# Altium PCB PCB.PcbDoc
Units mm, origin at the board's own origin, x right, y up, seen from the top; angles counter-clockwise.
Board outline 90 x 90 mm, 2 copper layers (Top Layer, Bottom Layer); 157 components, 81 nets, 472 pads, 104 vias.
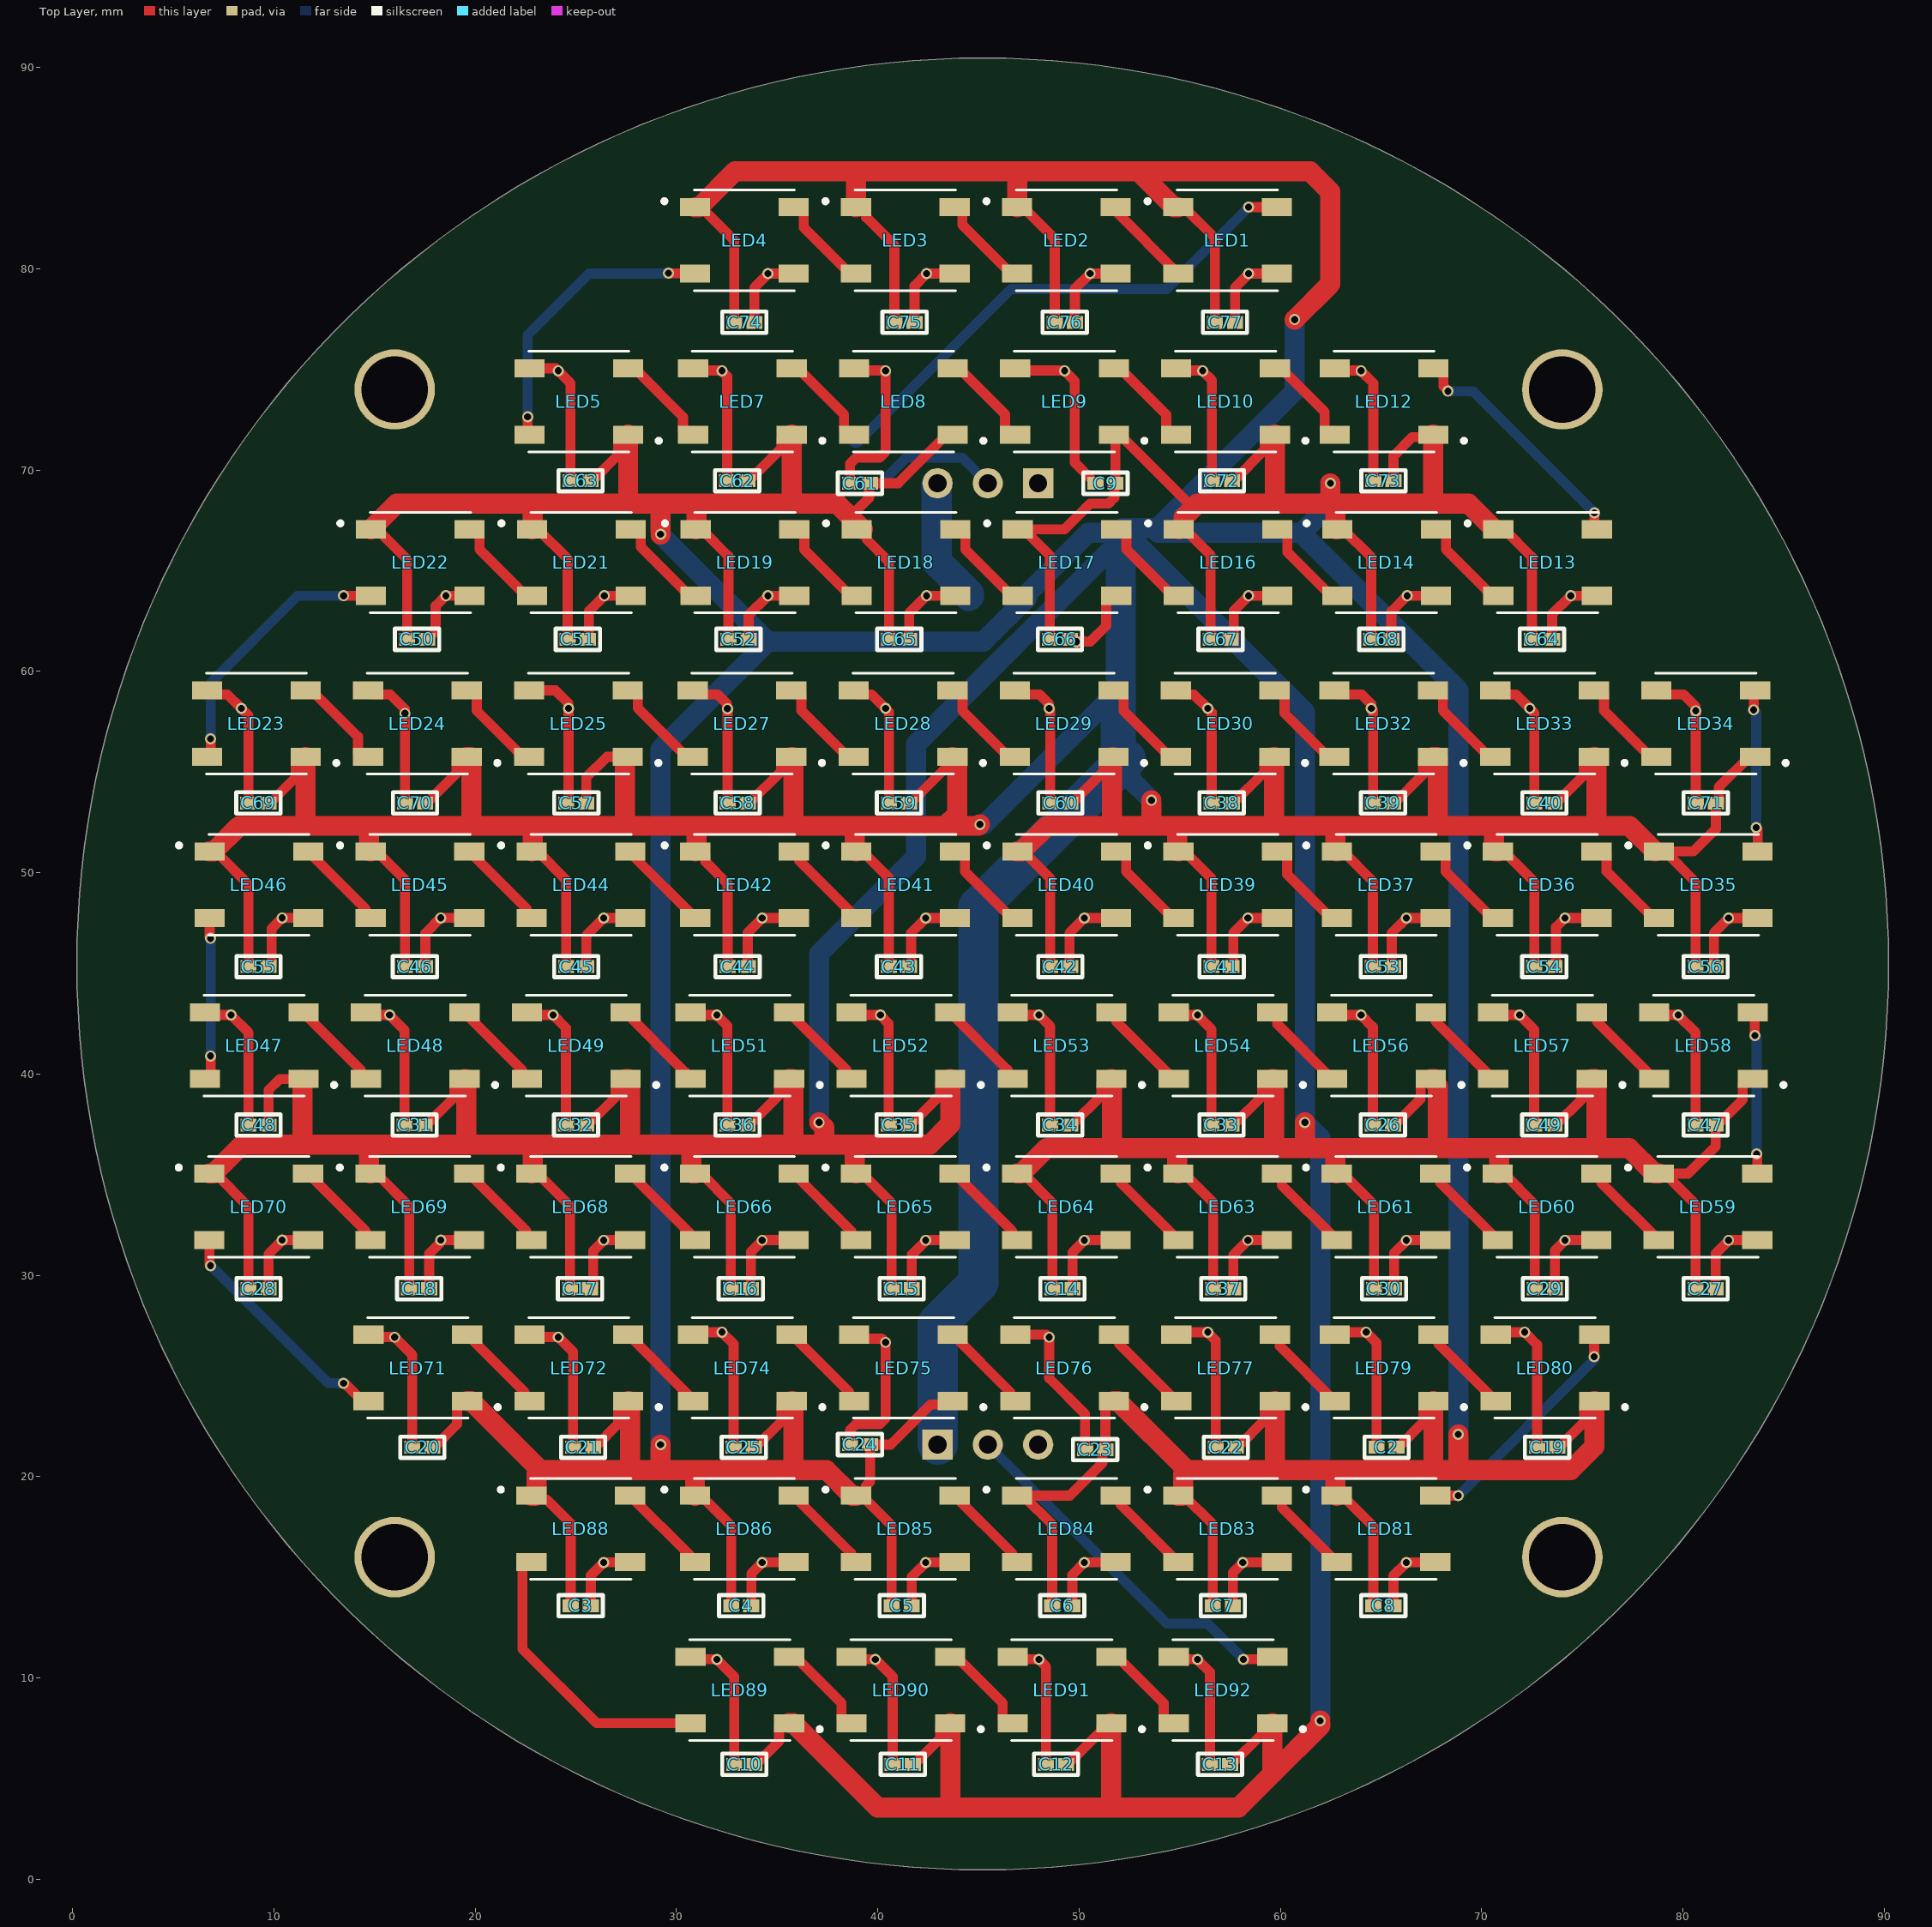
[diagram p0: Top Layer view]
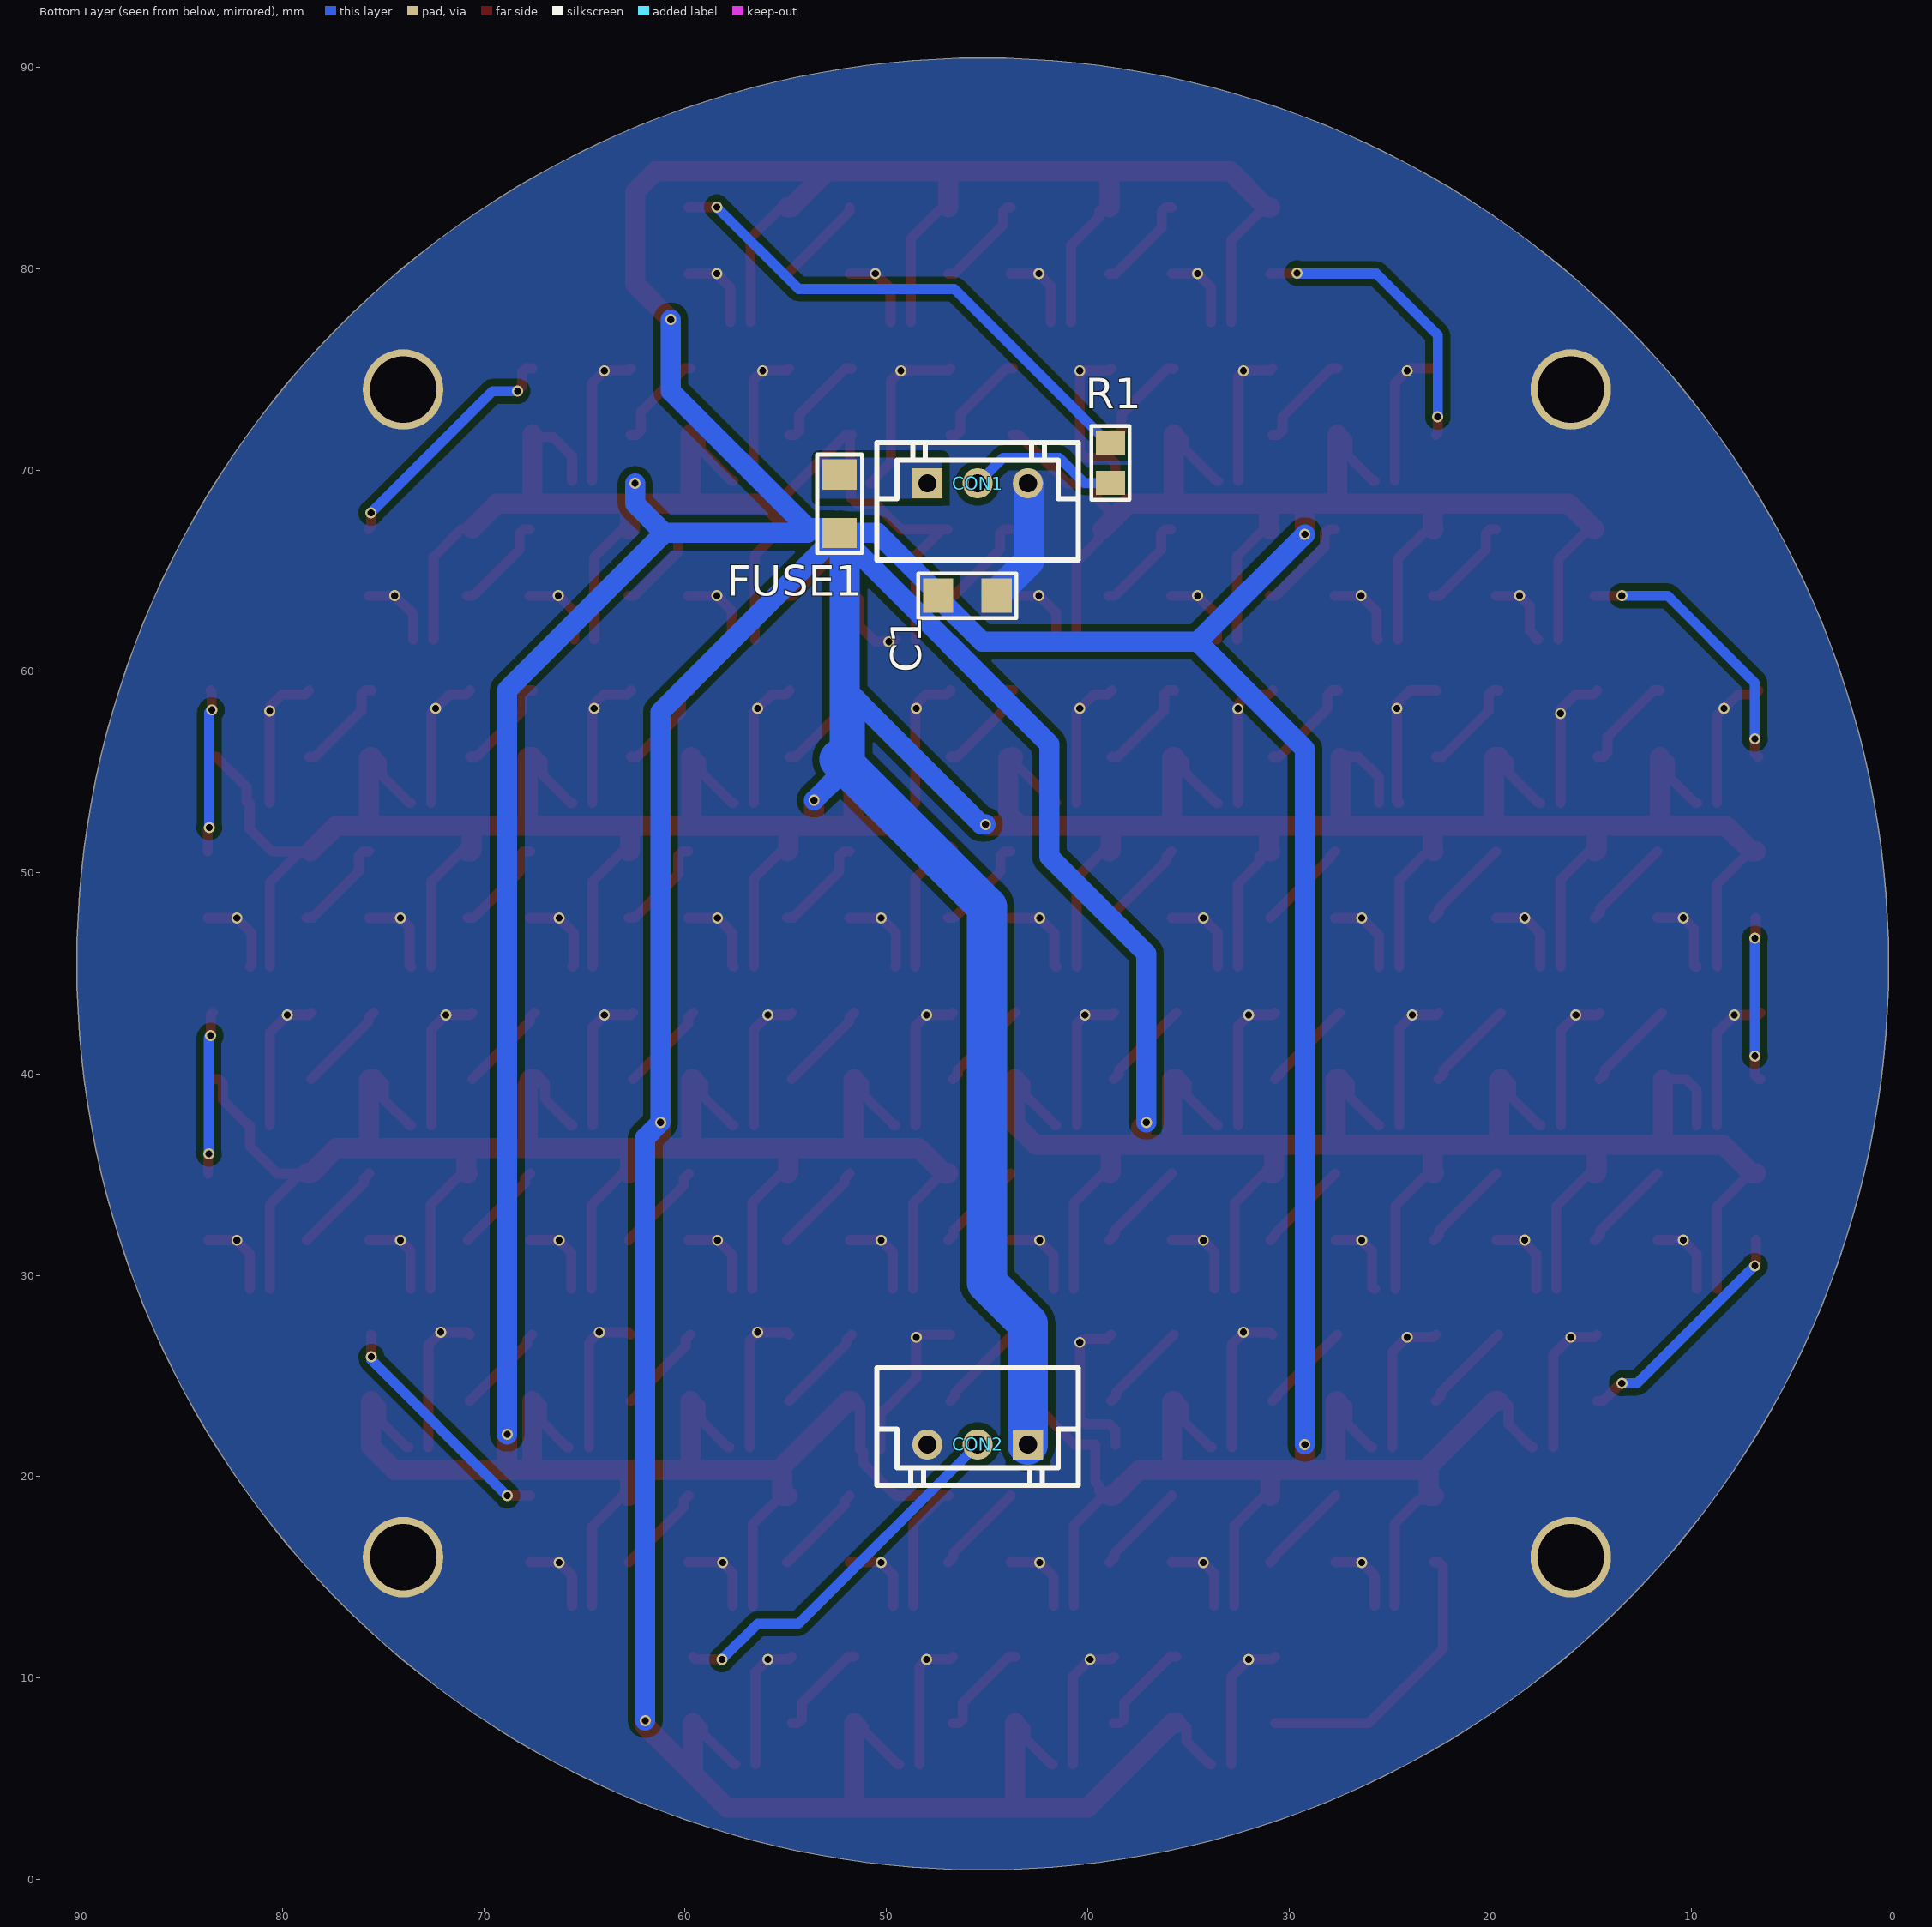
[diagram p1: Bottom Layer view, seen from below]
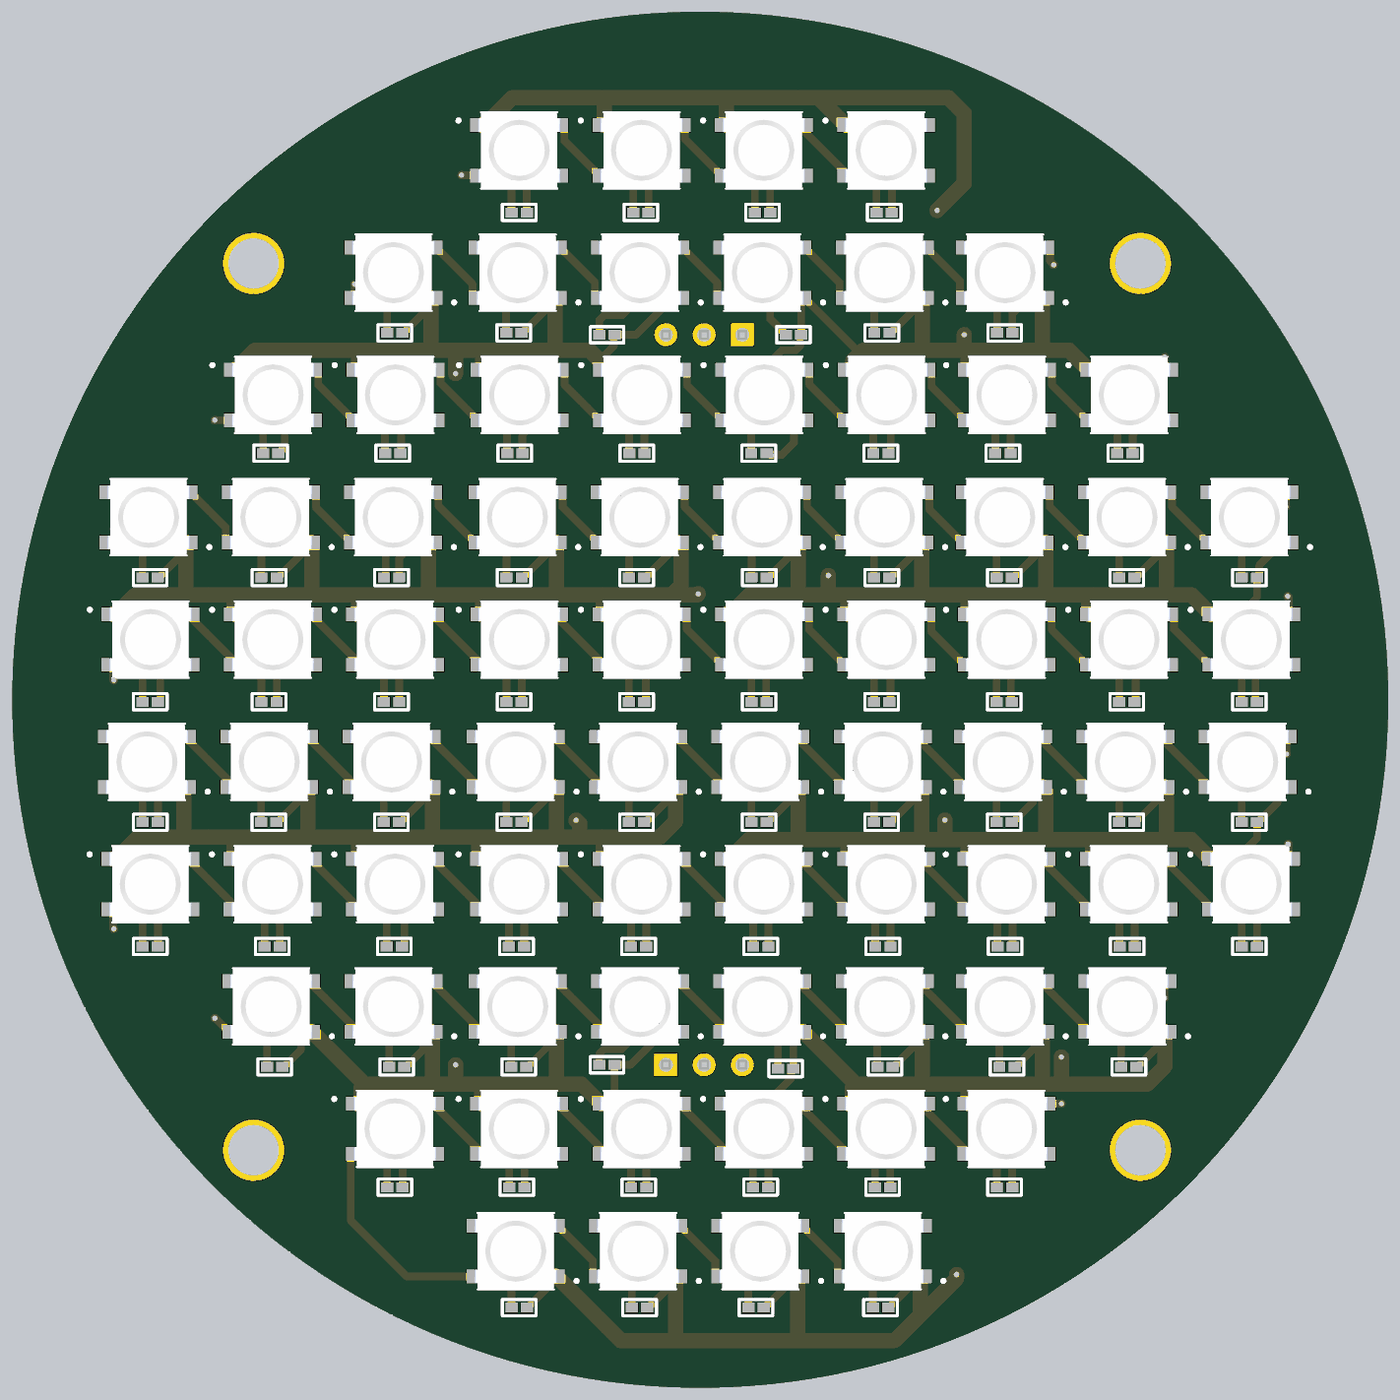
[diagram p2: 3D render of the assembled board from above, using the file's embedded part models]

## Layer stack, top to bottom
Top Solder: solder mask 0.0102, Solder Resist, Dk 3.5
Top Layer: signal copper 0.0356
Dielectric 1: dielectric 0.32, FR-4, Dk 4.8
Bottom Layer: signal copper 0.0356
Bottom Solder: solder mask 0.0102, Solder Resist, Dk 3.5

## Board outline
45.212,0.466 cw(c45.212,45.466) 0.212,45.466 cw(c45.212,45.466) 45.212,90.466 cw(c45.212,45.466) 90.212,45.466 cw(c45.212,45.466)

## Design rules (kind name [scope] priority, off if disabled: settings)
Clearance TOP5VPolygonRule [InNet('+5') And OnLayer('Top Layer')] p1: gap=0.15 ignorepadtopadclearanceinfootprint=FALSE except(0.127: Arc-Arc Arc-Track Arc-Text Track-Track Track-Text SMDPad-Text THPad-Text Via-Text Fill-Text Poly-Text Region-Text Text-Text; 0.2: Arc-Hole Track-Hole SMDPad-Hole THPad-Hole Via-Hole Fill-Hole Poly-Hole Region-Hole Text-Hole; 0.8: Arc-Poly Track-Poly SMDPad-Poly THPad-Poly Via-Poly Fill-Poly Poly-Poly)
Clearance [All] p2: gap=0.15 ignorepadtopadclearanceinfootprint=FALSE except(0.127: Arc-Arc Arc-Track Arc-Text Track-Track Track-Text SMDPad-Text THPad-Text Via-Text Fill-Text Poly-Text Region-Text Text-Text; 0.2: Arc-Hole Track-Hole SMDPad-Hole THPad-Hole Via-Hole Fill-Hole Poly-Hole Region-Hole Text-Hole; 0.3: SMDPad-Poly; 0.35: Arc-Poly Track-Poly THPad-Poly Via-Poly Fill-Poly Poly-Poly)
DiffPairsRouting ETH_Diff_Pairs [InDifferentialPairClass('ETH_100')] p1: maxlimit=0.127 minlimit=0.127 mostfreqgap=0.127 toplayer_minwidth=0.199 toplayer_maxwidth=0.201 toplayer_prefwidth=0.2 bottomlayer_minwidth=0.381 bottomlayer_maxwidth=0.381 bottomlayer_prefwidth=0.381 impedanceprofiledriven=TRUE impedanceprofileid={67EA3319-1B06-4267-A583-B87243AFF59C} maxuncoupledlength=12.7
DiffPairsRouting USB_Diff_Pairs [InDifferentialPairClass('USB_90')] p2: maxlimit=0.127 minlimit=0.127 mostfreqgap=0.127 toplayer_minwidth=0.263 toplayer_maxwidth=0.265 toplayer_prefwidth=0.264 bottomlayer_minwidth=0.381 bottomlayer_maxwidth=0.381 bottomlayer_prefwidth=0.381 impedanceprofiledriven=TRUE impedanceprofileid={53291188-D804-453C-AF2B-D6B1297CFEFC} maxuncoupledlength=12.7
DiffPairsRouting [All] p3: maxlimit=0.254 minlimit=0.254 mostfreqgap=0.254 toplayer_minwidth=0.127 toplayer_maxwidth=0.381 toplayer_prefwidth=0.381 bottomlayer_minwidth=0.127 bottomlayer_maxwidth=0.381 bottomlayer_prefwidth=0.381 maxuncoupledlength=12.7
HoleSize [All] p1: absolutevalues=TRUE maxlimit=6.3 minlimit=0.15 maxpercent=80.000 minpercent=20.000
HoleToHoleClearance [All] p1: gap=0.2 allowstackedmicrovias=TRUE
MatchedLengths IntraPairDiffAll [InDifferentialPairClass('All Differential Pairs')] p1: tolerance=0.1 checknetsindiffpair=TRUE checkdiffpairvsdiffpair=FALSE checkxsignals=FALSE checkothers=FALSE phasematching=TRUE phasetolerance=0.127 phasedistance=4
MatchedLengths InterPairDiffETH [InDifferentialPairClass('ETH_100')] p2: tolerance=5 checknetsindiffpair=FALSE checkdiffpairvsdiffpair=TRUE checkxsignals=TRUE checkothers=TRUE
MinimumSolderMaskSliver [All] p1: minsoldermaskwidth=0
PlaneConnect [All] p1: planeconnectstyle=Direct reliefexpansion=0.508 reliefentries=4 reliefconductorwidth=0.254 reliefairgap=0.254
PolygonConnect [All] p1: connectstyle=Direct reliefconductorwidth=0.254 reliefentries=4 polygonreliefangle="90 Angle" airgapwidth=0.254
RoutingVias [All] p1: holewidth=0.35 width=0.55 viastyle="Through Hole" minholewidth=0.15 minwidth=0.25 maxholewidth=1 maxwidth=1.5
SilkToSilkClearance [All] p1: silktosilkclearance=0.127
SilkToSolderMaskClearance [IsPad] p1: minsilkscreentomaskgap=0 clearancetoexposedcopper=TRUE
SolderMaskExpansion ViaExpansion [IsVia] p1: expansion=0 istentingtop=TRUE
SolderMaskExpansion [All] p2: expansion=0.051 istentingtop=FALSE
SupplyNets "Schematic Supply Nets" [InNet('+5')] p1: voltage=0.000
SupplyNets "Schematic Supply Nets_2" [InNet('GND')] p2: voltage=0.000
UnRoutedNet [All] p1: checkbadconnections=TRUE
Width I2S_Width [InNetClass('I2S_50')] p1: maxlimit=5.08 minlimit=0.127 preferedwidth=0.381 toplayer_minwidth=0.38 toplayer_maxwidth=0.382 bottomlayer_prefwidth=0.38 impedanceprofiledriven=TRUE impedanceprofileid={8BD9EF65-455B-45C8-BD0B-9EDE171B15C2} minimp=50.000000 maximp=50.000000 favimp=50.000000
Width [All] p2: maxlimit=5.08 minlimit=0.127 preferedwidth=0.3
22 further rules are at their usual default settings.

## Classes and differential pairs
component class LEDs: C1 CON1 CON2 FUSE1 LED1 LED2 LED3 LED4 LED5 LED7 LED8 LED9 LED10 LED12 LED13 LED14 LED16 LED17 LED18 LED19 LED21 LED22 LED23 LED24 LED25 LED27 LED28 LED29 LED30 LED32 LED33 LED34 LED35 LED36 LED37 LED39 LED40 LED41 LED42 LED44 LED45 LED46 LED47 LED48 LED49 LED51 LED52 LED53 LED54 LED56 LED57 LED58 LED59 LED60 LED61 LED63 LED64 LED65 LED66 LED68 LED69 LED70 LED71 LED72 LED74 LED75 LED76 LED77 LED79 LED80 LED81 LED83 LED84 LED85 LED86 LED88 LED89 LED90 LED91 LED92 R1
component class Capacitors: C2 C3 C4 C5 C6 C7 C8 C9 C10 C11 C12 C13 C14 C15 C16 C17 C18 C19 C20 C21 C22 C23 C24 C25 C26 C27 C28 C29 C30 C31 C32 C33 C34 C35 C36 C37 C38 C39 C40 C41 C42 C43 C44 C45 C46 C47 C48 C49 C50 C51 C52 C53 C54 C55 C56 C57 C58 C59 C60 C61 C62 C63 C64 C65 C66 C67 C68 C69 C70 C71 C72 C73 C74 C75 C76 C77

## Components (designator, comment, footprint, x,y, rotation, side; value= is the part's Value field where it differs from the comment)
C1 "47uF 10V" CAP_1206 45.974,63.754 r0 bottom
C2 "100nF" CAP_0402 65.273,21.458 r180 top
C3 "100nF" CAP_0402 25.242,13.584 r0 top
C4 "100nF" CAP_0402 33.216,13.584 r0 top
C5 "100nF" CAP_0402 41.19,13.584 r0 top
C6 "100nF" CAP_0402 49.164,13.584 r0 top
C7 "100nF" CAP_0402 57.138,13.584 r0 top
C8 "100nF" CAP_0402 65.112,13.584 r0 top
C9 "100nF" CAP_0402 51.308,69.342 r180 top
C10 "100nF" CAP_0402 33.37,5.71 r180 top
C11 "100nF" CAP_0402 41.244,5.71 r180 top
C12 "100nF" CAP_0402 48.856,5.71 r180 top
C13 "100nF" CAP_0402 57,5.71 r180 top
C14 "100nF" CAP_0402 49.171,29.332 r0 top
C15 "100nF" CAP_0402 41.183,29.332 r0 top
C16 "100nF" CAP_0402 33.195,29.332 r0 top
C17 "100nF" CAP_0402 25.208,29.332 r0 top
C18 "100nF" CAP_0402 17.22,29.332 r0 top
C19 "100nF" CAP_0402 73.248,21.458 r180 top
C20 "100nF" CAP_0402 17.376,21.458 r180 top
C21 "100nF" CAP_0402 25.359,21.458 r180 top
C22 "100nF" CAP_0402 57.29,21.458 r180 top
C23 "100nF" CAP_0402 50.8,21.336 r180 top
C24 "100nF" CAP_0402 39.116,21.59 r180 top
C25 "100nF" CAP_0402 33.342,21.458 r180 top
C26 "100nF" CAP_0402 65.09,37.46 r180 top
C27 "100nF" CAP_0402 81.122,29.332 r0 top
C28 "100nF" CAP_0402 9.24,29.332 r0 top
C29 "100nF" CAP_0402 73.134,29.332 r0 top
C30 "100nF" CAP_0402 65.146,29.332 r0 top
C31 "100nF" CAP_0402 16.994,37.46 r180 top
C32 "100nF" CAP_0402 25.01,37.46 r180 top
C33 "100nF" CAP_0402 57.074,37.46 r180 top
C34 "100nF" CAP_0402 49.058,37.46 r180 top
C35 "100nF" CAP_0402 41.042,37.46 r180 top
C36 "100nF" CAP_0402 33.026,37.46 r180 top
C37 "100nF" CAP_0402 57.159,29.332 r0 top
C38 "100nF" CAP_0402 57.085,53.462 r180 top
C39 "100nF" CAP_0402 65.1,53.462 r180 top
C40 "100nF" CAP_0402 73.115,53.462 r180 top
C41 "100nF" CAP_0402 57.079,45.334 r0 top
C42 "100nF" CAP_0402 49.065,45.334 r0 top
C43 "100nF" CAP_0402 41.051,45.334 r0 top
C44 "100nF" CAP_0402 33.037,45.334 r0 top
C45 "100nF" CAP_0402 25.022,45.334 r0 top
C46 "100nF" CAP_0402 17.008,45.334 r0 top
C47 "100nF" CAP_0402 81.122,37.46 r180 top
C48 "100nF" CAP_0402 9.24,37.46 r180 top
C49 "100nF" CAP_0402 73.106,37.46 r180 top
C50 "100nF" CAP_0402 17.114,61.59 r0 top
C51 "100nF" CAP_0402 25.097,61.59 r0 top
C52 "100nF" CAP_0402 33.08,61.59 r0 top
C53 "100nF" CAP_0402 65.094,45.334 r0 top
C54 "100nF" CAP_0402 73.108,45.334 r0 top
C55 "100nF" CAP_0402 9.24,45.334 r0 top
C56 "100nF" CAP_0402 81.122,45.334 r0 top
C57 "100nF" CAP_0402 25.024,53.462 r180 top
C58 "100nF" CAP_0402 33.039,53.462 r180 top
C59 "100nF" CAP_0402 41.054,53.462 r180 top
C60 "100nF" CAP_0402 49.07,53.462 r180 top
C61 "100nF" CAP_0402 39.116,69.342 r180 top
C62 "100nF" CAP_0402 33.014,69.464 r180 top
C63 "100nF" CAP_0402 25.234,69.464 r180 top
C64 "100nF" CAP_0402 72.994,61.59 r0 top
C65 "100nF" CAP_0402 41.063,61.59 r0 top
C66 "100nF" CAP_0402 49.045,61.59 r0 top
C67 "100nF" CAP_0402 57.028,61.59 r0 top
C68 "100nF" CAP_0402 65.011,61.59 r0 top
C69 "100nF" CAP_0402 9.232,53.462 r180 top
C70 "100nF" CAP_0402 17.009,53.462 r180 top
C71 "100nF" CAP_0402 81.13,53.462 r180 top
C72 "100nF" CAP_0402 57.094,69.464 r180 top
C73 "100nF" CAP_0402 65.12,69.464 r180 top
C74 "100nF" CAP_0402 33.37,77.338 r0 top
C75 "100nF" CAP_0402 41.329,77.338 r0 top
C76 "100nF" CAP_0402 49.287,77.338 r0 top
C77 "100nF" CAP_0402 57.246,77.338 r0 top
CON1 "HX-XH2.54-3PZZ" "JST XH2.54mm 1x3" 45.466,69.342 r0 bottom
CON2 "HX-XH2.54-3PZZ" "JST XH2.54mm 1x3" 45.466,21.59 r180 bottom
FUSE1 "2A" FUSE_1206 52.324,68.326 r90 bottom
LED1 "Worldsemi WS2812B-B/W" "SMD5050 - WS2812B-B" 57.37,81.402 r0 top
LED2 "Worldsemi WS2812B-B/W" "SMD5050 - WS2812B-B" 49.37,81.402 r0 top
LED3 "Worldsemi WS2812B-B/W" "SMD5050 - WS2812B-B" 41.37,81.402 r0 top
LED4 "Worldsemi WS2812B-B/W" "SMD5050 - WS2812B-B" 33.37,81.402 r0 top
LED5 "Worldsemi WS2812B-B/W" "SMD5050 - WS2812B-B" 25.148,73.402 r180 top
LED7 "Worldsemi WS2812B-B/W" "SMD5050 - WS2812B-B" 33.274,73.402 r180 top
LED8 "Worldsemi WS2812B-B/W" "SMD5050 - WS2812B-B" 41.274,73.402 r180 top
LED9 "Worldsemi WS2812B-B/W" "SMD5050 - WS2812B-B" 49.274,73.402 r180 top
LED10 "Worldsemi WS2812B-B/W" "SMD5050 - WS2812B-B" 57.274,73.402 r180 top
LED12 "Worldsemi WS2812B-B/W" "SMD5050 - WS2812B-B" 65.146,73.402 r180 top
LED13 "Worldsemi WS2812B-B/W" "SMD5050 - WS2812B-B" 73.271,65.402 r0 top
LED14 "Worldsemi WS2812B-B/W" "SMD5050 - WS2812B-B" 65.271,65.402 r0 top
LED16 "Worldsemi WS2812B-B/W" "SMD5050 - WS2812B-B" 57.399,65.402 r0 top
LED17 "Worldsemi WS2812B-B/W" "SMD5050 - WS2812B-B" 49.399,65.402 r0 top
LED18 "Worldsemi WS2812B-B/W" "SMD5050 - WS2812B-B" 41.399,65.402 r0 top
LED19 "Worldsemi WS2812B-B/W" "SMD5050 - WS2812B-B" 33.399,65.402 r0 top
LED21 "Worldsemi WS2812B-B/W" "SMD5050 - WS2812B-B" 25.273,65.402 r0 top
LED22 "Worldsemi WS2812B-B/W" "SMD5050 - WS2812B-B" 17.273,65.402 r0 top
LED23 "Worldsemi WS2812B-B/W" "SMD5050 - WS2812B-B" 9.13,57.402 r180 top
LED24 "Worldsemi WS2812B-B/W" "SMD5050 - WS2812B-B" 17.13,57.402 r180 top
LED25 "Worldsemi WS2812B-B/W" "SMD5050 - WS2812B-B" 25.13,57.402 r180 top
LED27 "Worldsemi WS2812B-B/W" "SMD5050 - WS2812B-B" 33.256,57.402 r180 top
LED28 "Worldsemi WS2812B-B/W" "SMD5050 - WS2812B-B" 41.256,57.402 r180 top
LED29 "Worldsemi WS2812B-B/W" "SMD5050 - WS2812B-B" 49.256,57.402 r180 top
LED30 "Worldsemi WS2812B-B/W" "SMD5050 - WS2812B-B" 57.256,57.402 r180 top
LED32 "Worldsemi WS2812B-B/W" "SMD5050 - WS2812B-B" 65.128,57.402 r180 top
LED33 "Worldsemi WS2812B-B/W" "SMD5050 - WS2812B-B" 73.128,57.402 r180 top
LED34 "Worldsemi WS2812B-B/W" "SMD5050 - WS2812B-B" 81.128,57.402 r180 top
LED35 "Worldsemi WS2812B-B/W" "SMD5050 - WS2812B-B" 81.255,49.402 r0 top
LED36 "Worldsemi WS2812B-B/W" "SMD5050 - WS2812B-B" 73.255,49.402 r0 top
LED37 "Worldsemi WS2812B-B/W" "SMD5050 - WS2812B-B" 65.255,49.402 r0 top
LED39 "Worldsemi WS2812B-B/W" "SMD5050 - WS2812B-B" 57.383,49.402 r0 top
LED40 "Worldsemi WS2812B-B/W" "SMD5050 - WS2812B-B" 49.383,49.402 r0 top
LED41 "Worldsemi WS2812B-B/W" "SMD5050 - WS2812B-B" 41.383,49.402 r0 top
LED42 "Worldsemi WS2812B-B/W" "SMD5050 - WS2812B-B" 33.383,49.402 r0 top
LED44 "Worldsemi WS2812B-B/W" "SMD5050 - WS2812B-B" 25.257,49.402 r0 top
LED45 "Worldsemi WS2812B-B/W" "SMD5050 - WS2812B-B" 17.257,49.402 r0 top
LED46 "Worldsemi WS2812B-B/W" "SMD5050 - WS2812B-B" 9.257,49.402 r0 top
LED47 "Worldsemi WS2812B-B/W" "SMD5050 - WS2812B-B" 9.022,41.402 r180 top
LED48 "Worldsemi WS2812B-B/W" "SMD5050 - WS2812B-B" 17.022,41.402 r180 top
LED49 "Worldsemi WS2812B-B/W" "SMD5050 - WS2812B-B" 25.022,41.402 r180 top
LED51 "Worldsemi WS2812B-B/W" "SMD5050 - WS2812B-B" 33.148,41.402 r180 top
LED52 "Worldsemi WS2812B-B/W" "SMD5050 - WS2812B-B" 41.148,41.402 r180 top
LED53 "Worldsemi WS2812B-B/W" "SMD5050 - WS2812B-B" 49.148,41.402 r180 top
LED54 "Worldsemi WS2812B-B/W" "SMD5050 - WS2812B-B" 57.148,41.402 r180 top
LED56 "Worldsemi WS2812B-B/W" "SMD5050 - WS2812B-B" 65.02,41.402 r180 top
LED57 "Worldsemi WS2812B-B/W" "SMD5050 - WS2812B-B" 73.02,41.402 r180 top
LED58 "Worldsemi WS2812B-B/W" "SMD5050 - WS2812B-B" 81.02,41.402 r180 top
LED59 "Worldsemi WS2812B-B/W" "SMD5050 - WS2812B-B" 81.242,33.402 r0 top
LED60 "Worldsemi WS2812B-B/W" "SMD5050 - WS2812B-B" 73.242,33.402 r0 top
LED61 "Worldsemi WS2812B-B/W" "SMD5050 - WS2812B-B" 65.242,33.402 r0 top
LED63 "Worldsemi WS2812B-B/W" "SMD5050 - WS2812B-B" 57.37,33.402 r0 top
LED64 "Worldsemi WS2812B-B/W" "SMD5050 - WS2812B-B" 49.37,33.402 r0 top
LED65 "Worldsemi WS2812B-B/W" "SMD5050 - WS2812B-B" 41.37,33.402 r0 top
LED66 "Worldsemi WS2812B-B/W" "SMD5050 - WS2812B-B" 33.37,33.402 r0 top
LED68 "Worldsemi WS2812B-B/W" "SMD5050 - WS2812B-B" 25.244,33.402 r0 top
LED69 "Worldsemi WS2812B-B/W" "SMD5050 - WS2812B-B" 17.244,33.402 r0 top
LED70 "Worldsemi WS2812B-B/W" "SMD5050 - WS2812B-B" 9.244,33.402 r0 top
LED71 "Worldsemi WS2812B-B/W" "SMD5050 - WS2812B-B" 17.149,25.402 r180 top
LED72 "Worldsemi WS2812B-B/W" "SMD5050 - WS2812B-B" 25.149,25.402 r180 top
LED74 "Worldsemi WS2812B-B/W" "SMD5050 - WS2812B-B" 33.275,25.402 r180 top
LED75 "Worldsemi WS2812B-B/W" "SMD5050 - WS2812B-B" 41.275,25.402 r180 top
LED76 "Worldsemi WS2812B-B/W" "SMD5050 - WS2812B-B" 49.275,25.402 r180 top
LED77 "Worldsemi WS2812B-B/W" "SMD5050 - WS2812B-B" 57.275,25.402 r180 top
LED79 "Worldsemi WS2812B-B/W" "SMD5050 - WS2812B-B" 65.147,25.402 r180 top
LED80 "Worldsemi WS2812B-B/W" "SMD5050 - WS2812B-B" 73.147,25.402 r180 top
LED81 "Worldsemi WS2812B-B/W" "SMD5050 - WS2812B-B" 65.242,17.402 r0 top
LED83 "Worldsemi WS2812B-B/W" "SMD5050 - WS2812B-B" 57.37,17.402 r0 top
LED84 "Worldsemi WS2812B-B/W" "SMD5050 - WS2812B-B" 49.37,17.402 r0 top
LED85 "Worldsemi WS2812B-B/W" "SMD5050 - WS2812B-B" 41.37,17.402 r0 top
LED86 "Worldsemi WS2812B-B/W" "SMD5050 - WS2812B-B" 33.37,17.402 r0 top
LED88 "Worldsemi WS2812B-B/W" "SMD5050 - WS2812B-B" 25.244,17.402 r0 top
LED89 "Worldsemi WS2812B-B/W" "SMD5050 - WS2812B-B" 33.148,9.402 r180 top
LED90 "Worldsemi WS2812B-B/W" "SMD5050 - WS2812B-B" 41.148,9.402 r180 top
LED91 "Worldsemi WS2812B-B/W" "SMD5050 - WS2812B-B" 49.148,9.402 r180 top
LED92 "Worldsemi WS2812B-B/W" "SMD5050 - WS2812B-B" 57.148,9.402 r180 top
R1 "500" RES_0805 38.862,70.358 r270 bottom

## Footprints (in the part's own frame and the unit in brackets; to place one, negate y for a bottom-side part, rotate by r counter-clockwise, add the part's x,y. Pads: shape width x height; smd on the part's side, far side on the other; paste and mask are expansions set on the pad)
CAP_0402 [mm] "Chip Capacitor, 2-Leads, Body 1,06x0,51mm, IPC Medium Density"
  rect 0.8x0.64 smd: 1(-0.5,0) 2(0.5,0)
  silkscreen extent -1.1,-0.53 1.1,0.53, body extent -0.55,-0.26 0.55,0.25, height 0.5
CAP_1206 [mm] "Chip Capacitor, 2-Leads, Body 3,05x1,56mm, IPC Medium Density"
  rect 1.5x1.7 smd: 1(-1.45,0) 2(1.45,0)
  silkscreen extent -2.44,-1.11 2.44,1.11, body extent -1.53,-0.8 1.53,0.8, height 0.8
FUSE_1206 [mm]
  rect 1.5x1.7 smd: 1(-1.45,0) 2(1.45,0)
  silkscreen extent -2.44,-1.11 2.44,1.11, body extent -1.53,-0.8 1.53,0.8, height 0.8
"JST XH2.54mm 1x3" [mm]
  rect 1.5x1.5 hole 0.9 paste-2539.97 mask+0.051: 1(2.5,0)
  round 1.5 hole 0.9 paste-2539.97 mask+0.051: 2(0,0) 3(-2.5,0)
  silkscreen extent -5,-2.03 5,3.81, body extent -4.95,-1.99 4.95,3.76, height 7.1
RES_0805 [mm]
  rect 1.2x1.45 smd: 1(-1,0) 2(1,0)
  silkscreen extent -1.83,-0.95 1.83,0.95, body extent -1.02,-0.7 1.02,0.7, height 1.3
"SMD5050 - WS2812B-B" [mm]
  rect 1.5x0.9 smd: 1(-2.45,1.65) 2(-2.45,-1.65) 3(2.45,-1.65) 4(2.45,1.65)
  silkscreen extent -4.07,-2.5 2.5,2.5, body extent -2.7,-2.5 2.7,2.5, height 1.62

## Part data
C1: library part CAP_1206, "CAP_1206", note="any manufacturer", sample link=https://www.lcsc.com/product-detail/C178332.html?spm=wm.fly.bg.5.xh___wm.fly.tp.3.ml&lcsc_vid=FFFZU1cHTlNeU1AHFQIIVgUAFgNWV1cEFVMNBl0AEgcxVlNeR1RZVVJUQVJaUTsOAxUeFF5JWBYZEEoKFBINSQcJGk4NBhADEA4cHktXRlVeSQwSGg0%3D, val="47uF 10V"
C2 C3 C4 C5 C6 C7 C8 C9 C10 C11 C12 C13 C14 C15 C16 C17 C18 C19 C20 C21 C22 C23 C24 C25 C26 C27 C28 C29 C30 C31 C32 C33 C34 C35 C36 C37 C38 C39 C40 C41 C42 C43 C44 C45 C46 C47 C48 C49 C50 C51 C52 C53 C54 C55 C56 C57 C58 C59 C60 C61 C62 C63 C64 C65 C66 C67 C68 C69 C70 C71 C72 C73 C74 C75 C76 C77: library part CAP_0402, "CAP_0402", note="any manufacturer", val=100nF
CON1 CON2: library part "JST XH2.54mm 1x3", "Connector Header 3 position 2.54mm Pitch 3A Through Hole -25℃~+85℃", note="any manufacturer", sample link=https://www.lcsc.com/product-detail/C42391661.html?spm=wm.fly.bg.3.stp___wm.sxq.ssx.spl&lcsc_vid=FVFdBVUFR1ULBQFWR1cKXlxXQwQPVFVUQFJaUFIARFkxVlNRT1lcU11RQ1ZeUTtW, unit price="$ 0.0102", val=HX-XH2.54-3PZZ
FUSE1: library part Fuse_1206, "Fuse_1206", sample link=https://www.lcsc.com/product-detail/C2685749.html?s_z=n_q_t_ptc%2520fuse&spm=wm.fly.bg.0.xh___wm.ssy.tc.0.tz&lcsc_vid=FFFZU1cHTlNeU1AHFQIIVgUAFgNWV1cEFVMNBl0AEgcxVlNeR1RZVlxRRVZfUTsOAxUeFF5JWBYZEEoKFBINSQcJGk4eFQsCAgIaSgADAwAHC0slRVheX1JXRU8GEwkK, val=2A
LED1 LED2 LED3 LED4 LED5 LED7 LED8 LED9 LED10 LED12 LED13 LED14 LED16 LED17 LED18 LED19 LED21 LED22 LED23 LED24 LED25 LED27 LED28 LED29 LED30 LED32 LED33 LED34 LED35 LED36 LED37 LED39 LED40 LED41 LED42 LED44 LED45 LED46 LED47 LED48 LED49 LED51 LED52 LED53 LED54 LED56 LED57 LED58 LED59 LED60 LED61 LED63 LED64 LED65 LED66 LED68 LED69 LED70 LED71 LED72 LED74 LED75 LED76 LED77 LED79 LED80 LED81 LED83 LED84 LED85 LED86 LED88 LED89 LED90 LED91 LED92: "Intelligent control LED integrated light source", price="$ 0.0981", sample link=https://www.lcsc.com/product-detail/C114586.html?s_z=s_undefined_t_WS2812B&spm=wm.fly.bg.0.xh___wm.ssy.tc.1.tz&lcsc_vid=RAULBAcCRwJfVQVVFgVdUgVREQNXXlAEEwRbVVBTRAAxVlNeR1RZVlRVQFhbVTsOAxUeFF5JWBYZEEoKFBINSQcJGk4eFQsCAgIaSgADAwAHC0slQ1NdXlFXTlNADxALGw%3D%3D, val="Worldsemi WS2812B-B/W"
R1: library part RES_0805, "RES_0805", note="any manufacturer", val=500

## Free pads (board coordinates)
  round 4 hole 3.3: 2(16,16) 2(16,74) 2(74,16) 2(74,74)

## Via types
v1: diameter 0.55, hole 0.35, Top Layer to Bottom Layer, tented both sides, 104 vias

## Nets (pads, with @x,y where several pads share a name; then routed paths per layer and width w, separated by ;. In a path a pad name is that pad's centre, name@x,y a point inside that pad or via, vN(x,y) a via of type N, cw(c..) or ccw(c..) an arc to the next point about the centre after c; other vN are vias at no path point)
+5: C1.2 C2.1 C3.1 C4.1 C5.1 C6.1 C7.1 C8.1 C9.1 C10.1 C11.1 C12.1 C13.1 C14.1 C15.1 C16.1 C17.1 C18.1 C19.1 C20.1 C21.1 C22.1 C23.1 C24.1 C25.1 C26.1 C27.1 C28.1 C29.1 C30.1 C31.1 C32.1 C33.1 C34.1 C35.1 C36.1 C37.1 C38.1 C39.1 C40.1 C41.1 C42.1 C43.1 C44.1 C45.1 C46.1 C47.1 C48.1 C49.1 C50.1 C51.1 C52.1 C53.1 C54.1 C55.1 C56.1 C57.1 C58.1 C59.1 C60.1 C61.1 C62.1 C63.1 C64.1 C65.1 C66.1 C67.1 C68.1 C69.1 C70.1 C71.1 C72.1 C73.1 C74.1 C75.1 C76.1 C77.1 CON2.1 FUSE1.1 LED1.1 LED2.1 LED3.1 LED4.1 LED5.1 LED7.1 LED8.1 LED9.1 LED10.1 LED12.1 LED13.1 LED14.1 LED16.1 LED17.1 LED18.1 LED19.1 LED21.1 LED22.1 LED23.1 LED24.1 LED25.1 LED27.1 LED28.1 LED29.1 LED30.1 LED32.1 LED33.1 LED34.1 LED35.1 LED36.1 LED37.1 LED39.1 LED40.1 LED41.1 LED42.1 LED44.1 LED45.1 LED46.1 LED47.1 LED48.1 LED49.1 LED51.1 LED52.1 LED53.1 LED54.1 LED56.1 LED57.1 LED58.1 LED59.1 LED60.1 LED61.1 LED63.1 LED64.1 LED65.1 LED66.1 LED68.1 LED69.1 LED70.1 LED71.1 LED72.1 LED74.1 LED75.1 LED76.1 LED77.1 LED79.1 LED80.1 LED81.1 LED83.1 LED84.1 LED85.1 LED86.1 LED88.1 LED89.1 LED90.1 LED91.1 LED92.1 | length 1152.8
  Top Layer w0.5: LED70.1@7.094,35.052 8.74,33.406 C28.1 ; LED46.1@7.107,51.052 8.74,49.419 C55.1 ; C69.1 9.812,53.462 11.08,54.73 11.08,55.552 11.28,55.752 LED23.1 ; C48.1 9.74,39.204 10.288,39.752 LED47.1 ; LED69.1@15.094,35.052 16.72,33.426 C18.1 ; LED45.1@15.107,51.052 16.508,49.651 C46.1 ; LED22.1@15.123,67.052 16.614,65.561 C50.1 ; C31.1 17.574,37.46 18.972,38.858 18.972,39.552 19.172,39.752 LED48.1 ; C70.1 17.589,53.462 19.08,54.953 19.08,55.552 19.28,55.752 LED24.1 ; C20.1 17.956,21.458 19.099,22.601 19.099,23.552 19.299,23.752 LED71.1 ; LED88.1 22.994,18.852 23.566,18.852 24.742,17.676 C3.1 ; LED68.1@23.094,35.052 24.708,33.438 C17.1 ; LED44.1@23.107,51.052 24.522,49.637 C45.1 ; LED21.1@23.123,67.052 24.597,65.578 C51.1 ; C32.1 25.59,37.46 26.972,38.842 26.972,39.552 27.172,39.752 LED49.1 ; C57.1 25.524,54.734 26.542,55.752 LED25.1 ; C63.1 25.814,69.464 27.098,70.748 27.098,71.552 27.298,71.752 LED5.1 ; C21.1 25.939,21.458 27.099,22.618 27.099,23.552 27.299,23.752 LED72.1 ; LED86.1 31.22,19.052 32.716,17.556 C4.1 ; 30.92,20.252 30.988,20.32 ; LED19.1 31.249,67.052 32.58,65.721 C52.1 ; LED66.1@31.22,35.052 32.695,33.577 C16.1 ; LED4.1@31.22,83.052 32.87,81.402 C74.1 ; LED42.1@31.233,51.052 31.433,50.852 31.433,50.552 32.537,49.448 C44.1 ; C62.1 33.594,69.464 35.224,71.094 35.224,71.552 35.424,71.752 LED7.1 ; C36.1 33.606,37.46 35.098,38.952 35.098,39.552 35.298,39.752 LED51.1 ; C58.1 33.619,53.462 35.206,55.049 35.206,55.552 35.406,55.752 LED27.1 ; C25.1 33.922,21.458 35.225,22.761 35.225,23.552 35.425,23.752 LED74.1 ; C10.1 33.95,5.71 35.098,6.858 35.098,7.552 35.298,7.752 LED89.1 ; 38.626,67.675 39.564,68.613 39.564,69.29 C61.1 41.014,69.342 43.424,71.752 LED8.1 ; LED85.1 LED85.1@39.22,19.052 ; LED3.1 39.22,83.052 39.42,82.852 39.42,82.552 40.829,81.143 C75.1 ; 38.92,84.64 39.116,84.836 ; LED65.1@39.22,35.052 40.683,33.589 C15.1 ; LED41.1@39.233,51.052 40.551,49.734 C43.1 ; LED18.1@39.249,67.052 39.449,66.852 39.449,66.552 40.563,65.438 C65.1 ; C5.1 40.69,17.582 LED85.1@39.22,19.052 ; C35.1 41.622,37.46 43.098,38.936 43.098,39.552 43.298,39.752 LED52.1 ; C59.1 41.634,53.462 43.756,55.584 LED28.1@43.756,55.702 ; C11.1 41.824,5.71 43.098,6.984 43.098,7.552 43.298,7.752 LED90.1 ; LED75.1 43.556,23.583 42.633,23.583 40.64,21.59 C24.1 39.616,19.748 39.42,19.552 39.42,19.252 LED85.1@39.22,19.052 ; LED84.1 LED84.1@47.22,19.052 ; LED2.1 47.22,83.052 48.787,81.485 C76.1 ; 46.92,84.766 46.99,84.836 ; LED17.1 LED17.1@47.249,67.052 ; LED64.1@47.22,35.052 48.671,33.601 C14.1 ; LED40.1@47.233,51.052 48.565,49.72 C42.1 ; C66.1 48.545,65.756 LED17.1@47.249,67.052 ; C6.1 48.664,17.608 LED84.1@47.22,19.052 ; C12.1 49.436,5.71 51.098,7.372 51.098,7.552 51.298,7.752 LED91.1 ; C34.1 49.638,37.46 51.098,38.92 51.098,39.552 51.298,39.752 LED53.1 ; C60.1 49.65,53.462 51.206,55.018 51.206,55.552 51.406,55.752 51.684,55.752 LED29.1 ; LED76.1 51.5,23.752 51.3,23.552 C23.1 51.22,21.336 51.15,21.266 51.15,20.67 49.532,19.052 LED84.1@47.22,19.052 ; LED83.1@55.22,19.052 56.638,17.634 C7.1 ; LED63.1@55.22,35.052 56.659,33.613 C37.1 ; LED1.1@55.22,83.052 56.746,81.526 C77.1 ; LED39.1@55.233,51.052 56.579,49.706 C41.1 ; LED16.1@55.249,67.052 56.528,65.773 C67.1 ; 55.88,68.326 55.45,68.326 52.024,71.752 LED9.1 51.808,71.668 C9.1 51.75,69.284 51.75,68.619 51.458,68.326 50.546,68.326 49.272,67.052 LED17.1@47.249,67.052 ; C13.1 57.58,5.71 59.098,7.228 59.098,7.552 59.298,7.752 LED92.1 ; C33.1 57.654,37.46 59.098,38.904 59.098,39.552 59.298,39.752 LED54.1 ; C38.1 57.665,53.462 59.206,55.003 59.206,55.552 59.406,55.752 LED30.1 ; C72.1 57.674,69.464 59.224,71.014 59.224,71.552 59.424,71.752 LED10.1 ; C22.1 57.87,21.458 59.225,22.813 59.225,23.552 59.425,23.752 LED77.1 ; LED81.1@63.092,19.052 64.612,17.532 C8.1 ; LED61.1@63.092,35.052 64.646,33.498 C30.1 ; LED37.1@63.105,51.052 64.594,49.563 C53.1 ; LED14.1@63.121,67.052 64.511,65.662 C68.1 ; C26.1 65.67,37.46 66.97,38.76 66.97,39.552 67.17,39.752 LED56.1 ; C39.1 65.68,53.462 67.078,54.86 67.078,55.552 67.278,55.752 LED32.1 ; C73.1 65.62,70.7 66.548,71.628 67.472,71.628 LED12.1 ; C2.1 65.853,21.458 67.097,22.702 67.097,23.552 67.297,23.752 LED79.1 ; LED60.1@71.092,35.052 72.634,33.51 C29.1 ; LED36.1@71.105,51.052 72.608,49.549 C54.1 ; LED13.1@71.121,67.052 72.494,65.679 C64.1 ; C49.1 73.686,37.46 74.97,38.744 74.97,39.552 75.17,39.752 LED57.1 ; C40.1 73.695,53.462 75.078,54.845 75.078,55.552 75.278,55.752 LED33.1 ; C19.1 73.828,21.458 75.097,22.727 75.097,23.552 75.297,23.752 LED80.1 ; LED59.1 LED59.1@79.092,35.052 ; LED35.1 LED35.1@79.105,51.052 ; C27.1 80.622,33.522 LED59.1@79.092,35.052 ; C56.1 80.622,49.535 LED35.1@79.105,51.052 ; C47.1 81.622,36.41 80.264,35.052 LED59.1@79.092,35.052 ; C71.1 81.63,52.166 80.516,51.052 LED35.1@79.105,51.052 ; C47.1@81.702,37.46 82.97,38.728 82.97,39.552 83.17,39.752 LED58.1 ; C71.1@81.71,53.462 81.78,53.532 81.78,54.254 83.278,55.752 LED34.1
  Top Layer w1: LED70.1 6.994,35.052 8.432,36.49 11.43,36.49 ; LED46.1 7.007,51.052 8.279,52.324 11.506,52.324 ; LED47.1@11.43,39.71 11.43,36.49 ; LED23.1 11.58,52.399 11.506,52.324 ; LED69.1 14.782,35.052 14.732,35.102 14.732,36.49 ; LED45.1 14.782,51.052 14.732,51.102 14.732,52.324 ; LED22.1@14.832,67.061 16.097,68.326 22.86,68.326 ; LED48.1 19.508,39.752 19.558,39.702 19.558,36.49 ; LED24.1 19.762,55.752 19.812,55.702 19.812,52.324 ; LED71.1 19.799,23.752 23.231,20.32 ; LED88.1 22.994,19.052 23.044,19.102 23.044,20.133 23.231,20.32 ; LED68.1 22.81,35.052 22.86,35.102 22.86,36.49 ; LED44.1 22.81,51.052 22.86,51.102 22.86,52.324 ; LED21.1 22.86,67.089 22.86,68.326 ; LED25.1@27.432,55.702 27.432,52.324 ; LED49.1 27.636,39.752 27.686,39.702 27.686,36.49 ; LED5.1 27.598,68.414 27.686,68.326 ; LED72.1 27.636,23.752 27.686,23.702 27.686,20.32 ; v1(29.21,21.59) 29.21,20.447 29.337,20.32 ; v1(29.21,66.802) 29.21,68.072 29.464,68.326 ; LED86.1 30.92,20.252 ; LED66.1 30.784,35.052 30.734,35.102 30.734,36.49 ; LED4.1 31.12,83.052 32.904,84.836 39.116,84.836 46.99,84.836 52.936,84.836 ; LED42.1 30.938,51.052 30.988,51.102 30.988,52.324 ; LED19.1 30.988,67.091 30.988,68.326 ; LED89.1 35.798,7.752 39.994,3.556 43.434,3.556 ; LED51.1 35.764,39.752 35.814,39.702 35.814,36.49 ; LED27.1 35.764,55.752 35.814,55.702 35.814,52.324 ; LED7.1 35.724,68.67 36.068,68.326 ; LED74.1 35.764,23.752 35.814,23.702 35.814,20.32 ; v1(37.084,37.592) 37.338,37.338 37.338,36.49 ; LED85.1 38.72,19.052 37.452,20.32 35.814,20.32 ; LED65.1 38.912,35.052 38.862,35.102 38.862,36.49 ; LED3.1 38.92,84.64 ; LED41.1 38.912,51.052 38.862,51.102 38.862,52.324 ; LED18.1@39.249,67.052 38.626,67.675 37.975,68.326 36.068,68.326 ; LED90.1 43.598,3.72 43.434,3.556 ; LED52.1 43.598,37.502 42.586,36.49 38.862,36.49 ; LED28.1 43.756,55.702 43.942,55.702 43.942,52.91 43.356,52.324 ; v1(45.075,52.396) 45.003,52.324 43.356,52.324 ; LED64.1 47.12,35.052 48.39,36.322 51.627,36.322 ; LED2.1 46.92,84.766 ; LED40.1 47.133,51.052 48.405,52.324 51.634,52.324 ; LED91.1 51.598,3.592 51.562,3.556 ; LED53.1 51.627,39.723 51.627,36.322 ; LED29.1@51.684,55.752 51.634,55.702 51.634,52.324 ; LED76.1 51.925,23.752 55.357,20.32 ; v1(53.594,53.594) 53.594,52.324 ; LED83.1 55.12,19.052 55.17,19.102 55.17,20.133 55.357,20.32 ; LED63.1 54.914,35.052 54.864,35.102 54.864,36.322 ; LED1.1 54.72,83.052 52.936,84.836 ; LED39.1 54.914,51.052 54.864,51.102 54.864,52.324 ; LED16.1 54.999,67.102 55.199,67.102 55.199,67.645 55.88,68.326 59.69,68.326 ; LED92.1 59.598,5.242 ; LED54.1 59.64,39.752 59.69,39.702 59.69,36.322 ; LED30.1 59.69,55.736 59.69,52.324 ; LED10.1 59.724,68.36 59.69,68.326 ; LED77.1 59.725,20.355 59.69,20.32 ; v1(60.706,77.47) 62.484,79.248 62.484,83.82 61.468,84.836 52.936,84.836 ; v1(61.214,37.592) 61.214,36.322 ; v1(61.976,7.874) 61.976,7.62 59.598,5.242 ; 62.484,68.58 v1(62.484,69.342) ; LED81.1 62.788,19.052 62.738,19.102 62.738,20.32 ; LED61.1 62.788,35.052 62.738,35.102 62.738,36.322 ; LED37.1 62.788,51.052 62.738,51.102 62.738,52.324 ; LED14.1 62.788,67.052 62.738,67.102 62.738,68.326 ; LED56.1 67.67,39.752 67.72,39.702 67.72,39.502 67.818,39.404 67.818,36.322 ; LED32.1 67.768,55.752 67.818,55.702 67.818,52.324 ; LED12.1 67.596,68.358 67.564,68.326 ; LED79.1 67.597,20.353 67.564,20.32 ; v1(68.834,22.098) 68.834,20.32 ; LED13.1@70.571,67.102 69.347,68.326 67.564,68.326 ; LED60.1 70.816,35.052 70.866,35.102 70.866,36.322 ; LED36.1 70.662,51.052 70.612,51.102 70.612,52.324 ; LED57.1 75.642,39.752 75.692,39.702 75.692,36.322 ; LED33.1 75.642,55.752 75.692,55.702 75.692,52.324 ; LED80.1 75.597,21.495 74.422,20.32 68.834,20.32 ; LED35.1@78.605,51.052 77.333,52.324 75.692,52.324 ; LED59.1 78.592,35.052 77.322,36.322 75.692,36.322 ; 11.43,36.49 14.732,36.49 ; 11.506,52.324 14.732,52.324 ; 14.732,36.49 19.558,36.49 ; 14.732,52.324 19.812,52.324 ; 19.558,36.49 22.86,36.49 ; 19.812,52.324 22.86,52.324 ; 22.86,36.49 27.686,36.49 ; 22.86,52.324 27.432,52.324 ; 22.86,68.326 27.686,68.326 ; 23.231,20.32 27.686,20.32 ; 27.432,52.324 30.988,52.324 ; 27.686,20.32 29.337,20.32 ; 27.686,36.49 30.734,36.49 ; 27.686,68.326 29.464,68.326 ; 29.337,20.32 30.988,20.32 35.814,20.32 ; 29.464,68.326 30.988,68.326 ; 30.734,36.49 35.814,36.49 ; 30.988,52.324 35.814,52.324 ; 30.988,68.326 36.068,68.326 ; 35.814,36.49 37.338,36.49 ; 35.814,52.324 38.862,52.324 ; 37.338,36.49 38.862,36.49 ; 38.862,52.324 43.356,52.324 ; 43.434,3.556 51.562,3.556 ; 51.562,3.556 57.912,3.556 59.598,5.242 ; 51.627,36.322 54.864,36.322 ; 51.634,52.324 53.594,52.324 ; 53.594,52.324 54.864,52.324 ; 54.864,36.322 59.69,36.322 ; 54.864,52.324 59.69,52.324 ; 55.357,20.32 59.69,20.32 ; 59.69,20.32 62.738,20.32 ; 59.69,36.322 61.214,36.322 ; 59.69,52.324 62.738,52.324 ; 59.69,68.326 62.738,68.326 ; 61.214,36.322 62.738,36.322 ; 62.738,20.32 67.564,20.32 ; 62.738,36.322 67.818,36.322 ; 62.738,52.324 67.818,52.324 ; 62.738,68.326 67.564,68.326 ; 67.564,20.32 68.834,20.32 ; 67.818,36.322 70.866,36.322 ; 67.818,52.324 70.612,52.324 ; 70.612,52.324 75.692,52.324 ; 70.866,36.322 75.692,36.322
  Bottom Layer w1: v1(29.21,21.59) 29.21,56.134 34.544,61.468 ; v1(29.21,66.802) 34.544,61.468 ; v1(37.084,37.592) 37.084,45.974 41.91,50.8 41.91,56.388 51.974,66.452 51.974,66.626 FUSE1.1@52.031,66.626 ; v1(45.075,52.396) 45.284,52.396 50.8,57.912 51.562,58.674 ; C1.2 47.424,63.654 45.238,61.468 34.544,61.468 ; C1.2@47.424,63.854 50.446,66.876 FUSE1.1 ; 51.562,55.626 51.562,58.674 ; FUSE1.1@52.574,67.126 53.918,67.126 60.706,73.914 v1(60.706,77.47) ; FUSE1.1@52.674,66.526 61.214,57.986 v1(61.214,37.592) 61.976,36.83 v1(61.976,7.874) ; v1(53.594,53.594) 52.324,54.864 52.324,55.626 52.324,59.436 51.562,58.674 ; 53.918,66.876 61.034,66.876 ; v1(62.484,69.342) 62.484,68.326 61.034,66.876 ; v1(68.834,22.098) 68.834,59.076 61.034,66.876
  Bottom Layer w1.5: 52.07,59.182 52.07,66.083 52.224,66.237 52.224,66.876 FUSE1.1
  Bottom Layer w2: CON2.1 42.966,27.599 44.998,29.631 44.998,48.3 52.324,55.626
DataIn: LED1.4 R1.1 | length 25.8
  Top Layer w0.5: v1(58.42,83.058) 58.423,83.055 59.817,83.055 LED1.4
  Bottom Layer w0.5: R1.1 38.987,71.358 46.623,78.994 54.356,78.994 v1(58.42,83.058)
DataOut: CON2.2 LED92.2 | length 18.6
  Top Layer w0.5: v1(58.166,10.922) 58.176,10.932 59.478,10.932 LED92.2
  Bottom Layer w0.5: CON2.2 54.356,12.7 56.388,12.7 v1(58.166,10.922)
DO1: LED8.2 LED9.4 | length 4.9
  Top Layer w0.5: LED8.2 44.024,75.052 46.324,72.752 46.324,71.952 46.524,71.752 LED9.4
DO2: LED16.2 LED17.4 | length 4.9
  Top Layer w0.5: LED17.4 52.149,67.052 52.349,66.852 52.349,66.052 54.649,63.752 LED16.2
DO3: LED24.2 LED25.4 | length 4.9
  Top Layer w0.5: LED24.2 19.88,59.052 20.08,58.852 20.08,58.052 22.38,55.752 LED25.4
DO4: LED32.2 LED33.4 | length 4.9
  Top Layer w0.5: LED32.2 67.878,59.052 68.078,58.852 68.078,58.052 70.378,55.752 LED33.4
DO5: LED40.2 LED41.4 | length 4.9
  Top Layer w0.5: LED41.4 44.133,51.052 44.333,50.852 44.333,50.052 46.633,47.752 LED40.2
DO6: LED48.2 LED49.4 | length 4.6
  Top Layer w0.5: LED48.2 22.322,40.202 22.322,40.002 LED49.4
DO7: LED56.2 LED57.4 | length 4.6
  Top Layer w0.5: LED56.2 67.72,42.802 67.72,42.602 LED57.4
DO8: LED64.2 LED65.4 | length 4.6
  Top Layer w0.5: LED65.4 46.67,32.202 46.67,32.002 LED64.2
DO9: LED72.2 LED74.4 | length 4.6
  Top Layer w0.5: LED72.2 30.575,24.076 30.575,24.002 LED74.4
DO10: LED80.2 LED81.4 | length 11.9
  Top Layer w0.5: LED81.4 67.693,19.051 v1(68.834,19.05) v1(68.834,19.05) ; v1(75.58,25.954) 75.58,27.035 LED80.2
  Bottom Layer w0.5: v1(68.834,19.05) 75.58,25.796 v1(75.58,25.954)
DO11: LED88.2 LED89.4 | length 14.5
  Top Layer w0.5: LED88.2 22.552,15.752 22.352,15.552 22.352,11.43 26.03,7.752 LED89.4
GND: C1.1 C2.2 C3.2 C4.2 C5.2 C6.2 C7.2 C8.2 C9.2 C10.2 C11.2 C12.2 C13.2 C14.2 C15.2 C16.2 C17.2 C18.2 C19.2 C20.2 C21.2 C22.2 C23.2 C24.2 C25.2 C26.2 C27.2 C28.2 C29.2 C30.2 C31.2 C32.2 C33.2 C34.2 C35.2 C36.2 C37.2 C38.2 C39.2 C40.2 C41.2 C42.2 C43.2 C44.2 C45.2 C46.2 C47.2 C48.2 C49.2 C50.2 C51.2 C52.2 C53.2 C54.2 C55.2 C56.2 C57.2 C58.2 C59.2 C60.2 C61.2 C62.2 C63.2 C64.2 C65.2 C66.2 C67.2 C68.2 C69.2 C70.2 C71.2 C72.2 C73.2 C74.2 C75.2 C76.2 C77.2 CON1.3 CON2.3 LED1.3 LED2.3 LED3.3 LED4.3 LED5.3 LED7.3 LED8.3 LED9.3 LED10.3 LED12.3 LED13.3 LED14.3 LED16.3 LED17.3 LED18.3 LED19.3 LED21.3 LED22.3 LED23.3 LED24.3 LED25.3 LED27.3 LED28.3 LED29.3 LED30.3 LED32.3 LED33.3 LED34.3 LED35.3 LED36.3 LED37.3 LED39.3 LED40.3 LED41.3 LED42.3 LED44.3 LED45.3 LED46.3 LED47.3 LED48.3 LED49.3 LED51.3 LED52.3 LED53.3 LED54.3 LED56.3 LED57.3 LED58.3 LED59.3 LED60.3 LED61.3 LED63.3 LED64.3 LED65.3 LED66.3 LED68.3 LED69.3 LED70.3 LED71.3 LED72.3 LED74.3 LED75.3 LED76.3 LED77.3 LED79.3 LED80.3 LED81.3 LED83.3 LED84.3 LED85.3 LED86.3 LED88.3 LED89.3 LED90.3 LED91.3 LED92.3 pad.2 | length 434
  Top Layer w0.5: LED47.3 6.688,42.936 7.864,42.936 v1(7.874,42.926) 8.74,42.06 C48.2 ; LED23.3 6.88,58.852 7.682,58.852 8.368,58.166 v1(8.382,58.166) 8.382,58.152 8.732,57.802 C69.2 ; C28.2 9.74,31.062 10.414,31.736 v1(10.414,31.75) v1(10.414,31.75) 11.693,31.751 LED70.3 ; C55.2 9.82,45.334 9.89,45.404 9.89,47.228 v1(10.414,47.752) LED46.3 ; LED48.3 14.688,42.936 15.738,42.936 v1(15.748,42.926) 16.494,42.18 C31.2 ; LED24.3 14.88,58.852 15.778,58.852 16.5,58.129 16.5,57.922 v1(16.51,57.912) C70.2 ; LED71.3 14.817,26.934 15.992,26.934 v1(16.002,26.924) 16.876,26.05 C20.2 ; C46.2 17.526,45.352 17.526,46.99 v1(18.288,47.752) LED45.3 ; C50.2 17.694,61.59 17.764,61.66 17.764,61.74 18.034,62.01 18.034,63.246 v1(18.542,63.754) v1(18.542,63.754) 19.722,63.753 LED22.3 ; C18.2 17.72,31.074 18.278,31.633 18.278,31.727 v1@18.288,31.727 ; v1(18.288,31.75) LED69.3@19.692,31.75 ; LED49.3 22.688,42.936 23.866,42.936 v1(23.876,42.926) 23.876,42.912 24.51,42.278 C32.2 ; LED25.3 23.992,59.052 24.628,58.416 24.628,58.176 v1(24.638,58.166) ; LED5.3 23.994,75.052 24.116,74.93 v1(24.13,74.93) 24.13,74.916 24.734,74.312 C63.2 ; LED72.3 22.817,26.934 24.12,26.934 v1(24.13,26.924) 24.859,26.195 C21.2 ; C57.2 24.568,53.462 24.638,53.532 v1@24.638,58.152 ; C45.2 25.522,46.881 v1(26.381,47.74) 26.388,47.746 27.701,47.746 LED44.3 ; C51.2 25.654,61.647 25.654,62.992 v1(26.416,63.754) v1(26.416,63.754) 27.722,63.753 LED21.3 ; C17.2 25.788,29.332 25.858,29.402 25.858,31.214 26.389,31.745 27.687,31.745 LED68.3 ; C3.2 25.742,15.083 26.381,15.722 v1(26.381,15.736) 26.39,15.744 27.686,15.744 LED88.3 ; LED89.3 30.818,10.932 31.994,10.932 v1(32.004,10.922) 32.87,10.056 C10.2 ; LED51.3 30.814,42.936 31.994,42.936 v1(32.004,42.926) 32.004,42.912 32.526,42.39 C36.2 ; LED27.3 31.006,58.852 32.034,58.852 32.502,58.383 32.502,58.176 32.512,58.166 32.512,58.152 v1@32.524,58.14 ; LED7.3 30.936,74.94 32.248,74.94 v1(32.258,74.93) 32.258,74.916 32.514,74.66 C62.2 ; LED74.3 30.941,27.168 32.248,27.168 v1(32.258,27.178) 32.258,27.164 32.842,26.581 C25.2 ; v1(32.531,58.147) v1@32.524,58.14 ; C58.2 32.539,58.125 v1@32.524,58.14 ; C44.2 33.537,47.009 34.255,47.727 v1(34.255,47.74) 34.262,47.746 35.827,47.746 LED42.3 ; C52.2 33.58,62.79 v1(34.544,63.754) v1(34.544,63.754) 35.848,63.753 LED19.3 ; C16.2 33.695,31.164 34.255,31.724 v1(34.255,31.738) 34.263,31.745 35.813,31.745 LED66.3 ; C4.2 33.716,15.183 34.255,15.722 v1(34.255,15.736) 34.264,15.744 35.812,15.744 LED86.3 ; C74.2 33.87,79.068 34.544,79.742 v1(34.544,79.756) 35.816,79.756 LED4.3 ; C24.2 38.616,22.313 38.909,22.606 40.093,22.606 40.386,22.899 v1(40.386,26.67) 40.372,26.67 40.19,26.852 39.025,26.852 LED75.3 ; C61.2 38.616,70.319 38.909,70.612 40.093,70.612 40.386,70.905 v1(40.386,74.93) 40.376,74.94 38.936,74.94 LED8.3 ; LED90.3 38.818,10.932 39.868,10.932 v1(39.878,10.922) 40.744,10.056 C11.2 ; LED52.3 38.814,42.936 40.122,42.936 v1(40.132,42.926) 40.132,42.912 40.542,42.502 C35.2 ; LED28.3 39.006,58.852 39.686,58.852 40.372,58.166 v1(40.386,58.166) 40.386,58.152 40.554,57.984 C59.2 ; C43.2 41.586,45.334 41.656,45.404 41.656,47.012 v1(42.383,47.74) 42.39,47.746 43.827,47.746 LED41.3 ; C65.2 41.563,62.899 v1(42.418,63.754) v1(42.418,63.754) 43.848,63.753 LED18.3 ; C15.2 41.683,31.024 42.383,31.724 v1(42.383,31.738) 42.391,31.745 43.813,31.745 LED65.3 ; C5.2 41.69,15.029 42.383,15.722 v1(42.383,15.736) 42.392,15.744 43.812,15.744 LED85.3 ; C75.2 41.829,79.153 42.418,79.742 v1(42.418,79.756) 42.42,79.754 43.818,79.754 LED3.3 ; LED91.3 46.818,10.932 47.996,10.932 v1(48.006,10.922) 48.006,10.908 48.356,10.558 C12.2 ; LED53.3 46.814,42.936 47.996,42.936 v1(48.006,42.926) 48.006,42.912 48.558,42.36 C34.2 ; LED29.3 47.006,58.852 48.036,58.852 48.504,58.383 48.504,58.176 v1(48.514,58.166) 48.514,58.152 48.57,58.097 C60.2 ; LED9.3 46.936,74.94 49.266,74.94 v1(49.276,74.93) 49.784,74.422 49.784,70.366 50.658,69.492 50.658,69.412 50.728,69.342 C9.2 ; LED76.3 48.372,27.052 48.5,26.924 v1(48.514,26.924) 48.514,24.892 50.292,23.114 50.292,21.344 C23.2 ; C66.2 49.615,61.52 49.809,61.52 49.861,61.468 v1(49.875,61.468) ; C42.2 49.53,45.369 49.53,47.012 v1(50.257,47.74) 50.264,47.746 51.827,47.746 LED40.3 ; C6.2 49.664,15.129 50.257,15.722 v1(50.257,15.736) 50.266,15.744 51.812,15.744 LED84.3 ; C14.2 49.671,31.138 50.257,31.724 v1(50.257,31.738) 50.265,31.745 51.813,31.745 LED64.3 ; C76.2 49.787,78.997 v1(50.546,79.756) 50.548,79.754 51.818,79.754 LED2.3 ; C66.2@49.875,61.52 50.226,61.52 50.278,61.468 50.292,61.468 50.302,61.478 50.556,61.478 51.349,62.271 51.349,63.552 51.549,63.752 LED17.3 ; LED92.3 54.818,10.932 55.87,10.932 v1(55.88,10.922) 55.88,10.908 56.5,10.288 C13.2 ; LED54.3 54.814,42.936 55.87,42.936 v1(55.88,42.926) 55.88,42.912 56.574,42.218 C33.2 ; LED30.3 55.006,58.852 55.688,58.852 56.374,58.166 v1(56.388,58.166) 56.388,58.152 56.585,57.956 C38.2 ; LED77.3 54.941,27.168 56.378,27.168 v1(56.388,27.178) 56.388,27.164 56.79,26.762 C22.2 ; LED10.3 54.936,74.94 56.124,74.94 v1(56.134,74.93) 56.134,74.916 56.594,74.457 C72.2 ; C67.2 57.608,61.59 57.678,61.66 57.678,63.012 v1(58.42,63.754) v1(58.42,63.754) 59.848,63.753 LED16.3 ; C41.2 57.588,45.334 57.658,45.404 57.658,47.012 v1(58.385,47.74) 58.392,47.746 59.827,47.746 LED39.3 ; C7.2 57.638,15.229 58.131,15.722 v1(58.131,15.736) 58.14,15.744 59.812,15.744 LED83.3 ; C37.2 57.659,31.011 v1(58.385,31.738) 58.393,31.745 59.813,31.745 LED63.3 ; C77.2 57.746,79.068 58.42,79.742 v1(58.42,79.756) 58.422,79.754 59.818,79.754 LED1.3 ; LED56.3 62.686,42.936 63.998,42.936 v1(64.008,42.926) 64.008,42.912 64.59,42.33 C26.2 ; LED32.3 62.878,58.852 64.038,58.852 64.506,58.383 64.506,58.176 v1(64.516,58.166) 64.516,58.152 64.6,58.069 C39.2 ; LED12.3 62.808,74.94 63.998,74.94 v1(64.008,74.93) 64.008,74.916 64.62,74.304 C73.2 ; LED79.3 62.813,27.168 64.252,27.168 v1(64.262,27.178) 64.262,27.164 64.773,26.653 C2.2 ; C68.2 65.511,62.971 v1(66.294,63.754) v1(66.294,63.754) 67.72,63.753 LED14.3 ; C53.2 65.532,45.396 65.532,47.012 v1(66.259,47.74) 66.266,47.746 67.699,47.746 LED37.3 ; C8.2 65.612,15.075 66.259,15.722 v1(66.259,15.736) 66.268,15.744 67.684,15.744 LED81.3 ; C30.2 65.646,31.111 66.259,31.724 v1(66.259,31.738) 66.267,31.745 67.685,31.745 LED61.3 ; LED57.3 70.686,42.936 71.872,42.936 v1(71.882,42.926) 71.882,42.924 72.606,42.2 C49.2 ; LED33.3 70.878,58.852 71.69,58.852 72.376,58.166 v1(72.39,58.166) 72.39,58.152 72.615,57.928 C40.2 ; LED80.3 70.813,27.168 72.126,27.168 v1(72.136,27.178) 72.136,27.164 72.748,26.552 C19.2 ; C64.2 73.494,62.826 v1(74.422,63.754) v1(74.422,63.754) 75.72,63.753 LED13.3 ; C54.2 73.618,45.334 73.688,45.404 73.688,47.294 74.14,47.746 75.699,47.746 LED36.3 ; C29.2 73.634,31.225 74.133,31.724 v1(74.133,31.738) 74.141,31.745 75.685,31.745 LED60.3 ; LED58.3 78.686,42.936 79.746,42.936 v1(79.756,42.926) 80.622,42.06 C47.2 ; LED34.3 78.878,58.852 80.026,58.852 80.62,58.258 80.62,58.05 v1(80.63,58.04) C71.2 ; C27.2 81.622,31.085 82.261,31.724 v1(82.261,31.738) 82.269,31.745 83.685,31.745 LED59.3 ; C56.2 81.604,45.334 81.534,45.404 81.534,47.012 v1(82.261,47.74) 82.268,47.746 83.699,47.746 LED35.3
  Bottom Layer w1.5: CON1.3 42.926,69.302 42.926,65.452 44.524,63.854 C1.1
  other v1: 26.381,31.738 74.133,47.74
NetCON1_1: CON1.1 FUSE1.2
NetCON1_2: CON1.2 R1.2 | length 7.6
  Bottom Layer w0.5: R1.2 40.148,69.358 41.402,70.612 44.196,70.612 CON1.2
NetLED1_2: LED1.2 LED2.4 | length 4.6
  Top Layer w0.5: LED2.4 51.82,82.852 LED1.2
NetLED2_2: LED2.2 LED3.4 | length 4.9
  Top Layer w0.5: LED3.4 44,83.052 44.2,82.852 44.2,82.172 46.62,79.752 LED2.2
NetLED3_2: LED3.2 LED4.4 | length 4.9
  Top Layer w0.5: LED4.4 36.12,83.052 36.32,82.852 36.32,82.052 38.62,79.752 LED3.2
NetLED4_2: LED4.2 LED5.4 | length 14.6
  Top Layer w0.5: v1(22.606,72.644) 22.606,71.844 LED5.4 ; v1(29.601,79.78) 29.611,79.77 30.902,79.77 LED4.2
  Bottom Layer w0.5: v1(22.606,72.644) 22.606,76.708 25.654,79.756 29.577,79.756 v1(29.601,79.78)
NetLED5_2: LED5.2 LED7.4 | length 5
  Top Layer w0.5: LED5.2 27.898,75.052 30.324,72.626 30.324,71.952 30.524,71.752 LED7.4
NetLED7_2: LED7.2 LED8.4 | length 4.9
  Top Layer w0.5: LED7.2 36.024,75.052 38.324,72.752 38.324,71.952 38.524,71.752 LED8.4
NetLED9_2: LED9.2 LED10.4 | length 4.9
  Top Layer w0.5: LED9.2 52.024,75.052 54.324,72.752 54.324,71.952 54.524,71.752 LED10.4
NetLED10_2: LED10.2 LED12.4 | length 4.9
  Top Layer w0.5: LED10.2 60.024,75.052 62.196,72.88 62.196,71.952 62.396,71.752 LED12.4
NetLED12_2: LED12.2 LED13.4 | length 12.3
  Top Layer w0.5: LED12.2 67.896,75.052 68.096,74.852 68.096,74.158 68.326,73.928 v1(68.326,73.914) ; v1(75.598,67.878) 75.598,67.175 LED13.4
  Bottom Layer w0.5: v1(68.326,73.914) 69.562,73.914 v1(75.598,67.878)
NetLED13_2: LED13.2 LED14.4 | length 4.9
  Top Layer w0.5: LED14.4 68.021,67.052 68.221,66.852 68.221,66.052 70.521,63.752 LED13.2
NetLED14_2: LED14.2 LED16.4 | length 4.9
  Top Layer w0.5: LED16.4 60.149,67.052 60.349,66.852 60.349,65.924 62.521,63.752 LED14.2
NetLED17_2: LED17.2 LED18.4 | length 4.9
  Top Layer w0.5: LED18.4 44.149,67.052 44.349,66.852 44.349,66.052 46.649,63.752 LED17.2
NetLED18_2: LED18.2 LED19.4 | length 4.9
  Top Layer w0.5: LED19.4 36.149,67.052 36.349,66.852 36.349,66.052 38.649,63.752 LED18.2
NetLED19_2: LED19.2 LED21.4 | length 5
  Top Layer w0.5: LED21.4 28.023,67.052 28.223,66.852 28.223,66.178 30.649,63.752 LED19.2
NetLED21_2: LED21.2 LED22.4 | length 4.9
  Top Layer w0.5: LED22.4 20.023,67.052 20.223,66.852 20.223,66.052 22.523,63.752 LED21.2
NetLED22_2: LED22.2 LED23.4 | length 13.5
  Top Layer w0.5: LED23.4 6.858,55.93 v1(6.858,56.642) ; v1(13.462,63.754) v1(13.462,63.754) 14.822,63.753 LED22.2
  Bottom Layer w0.5: v1(6.858,56.642) 6.858,59.436 11.176,63.754 v1(13.462,63.754)
NetLED23_2: LED23.2 LED24.4 | length 4.9
  Top Layer w0.5: LED23.2 11.88,59.052 14.18,56.752 14.18,55.952 14.38,55.752 LED24.4
NetLED25_2: LED25.2 LED27.4 | length 5
  Top Layer w0.5: LED25.2 27.88,59.052 28.08,58.852 28.08,58.178 30.506,55.752 LED27.4
NetLED27_2: LED27.2 LED28.4 | length 4.9
  Top Layer w0.5: LED27.2 36.006,59.052 36.206,58.852 36.206,58.052 38.506,55.752 LED28.4
NetLED28_2: LED28.2 LED29.4 | length 4.9
  Top Layer w0.5: LED28.2 44.006,59.052 44.206,58.852 44.206,58.052 46.506,55.752 LED29.4
NetLED29_2: LED29.2 LED30.4 | length 4.9
  Top Layer w0.5: LED29.2 52.006,59.052 52.206,58.852 52.206,58.052 54.506,55.752 LED30.4
NetLED30_2: LED30.2 LED32.4 | length 4.9
  Top Layer w0.5: LED30.2 60.006,59.052 60.206,58.852 60.206,57.924 62.378,55.752 LED32.4
NetLED33_2: LED33.2 LED34.4 | length 4.9
  Top Layer w0.5: LED33.2 75.878,59.052 76.078,58.852 76.078,58.052 78.378,55.752 LED34.4
NetLED34_2: LED34.2 LED35.4 | length 8.1
  Top Layer w0.5: v1(83.514,58.087) 83.514,58.988 LED34.2 ; v1(83.635,52.241) 83.635,52.227 83.705,52.158 LED35.4
  Bottom Layer w0.5: v1(83.514,58.087) 83.514,58.074 83.635,57.952 v1@83.635,52.255
NetLED35_2: LED35.2 LED36.4 | length 4.9
  Top Layer w0.5: LED36.4 76.005,51.052 76.205,50.852 76.205,50.052 78.505,47.752 LED35.2
NetLED36_2: LED36.2 LED37.4 | length 4.9
  Top Layer w0.5: LED37.4 68.005,51.052 68.205,50.852 68.205,50.052 70.505,47.752 LED36.2
NetLED37_2: LED37.2 LED39.4 | length 4.9
  Top Layer w0.5: LED39.4 60.133,51.052 60.333,50.852 60.333,49.924 62.505,47.752 LED37.2
NetLED39_2: LED39.2 LED40.4 | length 4.9
  Top Layer w0.5: LED40.4 52.133,51.052 52.333,50.852 52.333,50.052 54.633,47.752 LED39.2
NetLED41_2: LED41.2 LED42.4 | length 4.6
  Top Layer w0.5: LED42.4 36.083,50.802 36.083,50.602 LED41.2
NetLED42_2: LED42.2 LED44.4 | length 4.6
  Top Layer w0.5: LED44.4 27.957,50.802 27.957,50.728 LED42.2
NetLED44_2: LED44.2 LED45.4 | length 4.6
  Top Layer w0.5: LED45.4 22.557,48.202 22.557,48.002 LED44.2
NetLED45_2: LED45.2 LED46.4 | length 4.6
  Top Layer w0.5: LED46.4 14.557,48.202 14.557,48.002 LED45.2
NetLED46_2: LED46.2 LED47.4 | length 8.2
  Top Layer w0.5: LED47.4 6.658,39.752 6.858,39.952 v1(6.858,40.894) ; LED46.2 6.807,46.787 v1(6.858,46.736)
  Bottom Layer w0.5: v1(6.858,40.894) v1(6.858,46.736)
NetLED47_2: LED47.2 LED48.4 | length 4.6
  Top Layer w0.5: LED47.2 14.322,40.202 14.322,40.002 LED48.4
NetLED49_2: LED49.2 LED51.4 | length 4.6
  Top Layer w0.5: LED49.2 30.448,40.076 30.448,40.002 LED51.4
NetLED51_2: LED51.2 LED52.4 | length 4.6
  Top Layer w0.5: LED51.2 38.448,40.202 38.448,40.002 LED52.4
NetLED52_2: LED52.2 LED53.4 | length 4.6
  Top Layer w0.5: LED52.2 46.448,40.202 46.448,40.002 LED53.4
NetLED53_2: LED53.2 LED54.4 | length 4.6
  Top Layer w0.5: LED53.2 51.848,42.802 51.848,42.602 LED54.4
NetLED54_2: LED54.2 LED56.4 | length 4.5
  Top Layer w0.5: LED54.2 59.848,42.802 59.848,42.474 LED56.4
NetLED57_2: LED57.2 LED58.4 | length 4.6
  Top Layer w0.5: LED57.2 75.72,42.802 75.72,42.602 LED58.4
NetLED58_2: LED58.2 LED59.4 | length 8.1
  Top Layer w0.5: LED58.2 83.566,42.956 v1(83.566,41.91) ; v1(83.657,36.032) 83.692,35.997 LED59.4
  Bottom Layer w0.5: v1(83.566,41.91) 83.566,41.896 83.657,41.806 v1(83.657,36.032)
NetLED59_2: LED59.2 LED60.4 | length 4.6
  Top Layer w0.5: LED60.4 75.942,34.802 75.942,34.602 LED59.2
NetLED60_2: LED60.2 LED61.4 | length 4.6
  Top Layer w0.5: LED61.4 67.942,34.802 67.942,34.602 LED60.2
NetLED61_2: LED61.2 LED63.4 | length 4.5
  Top Layer w0.5: LED63.4 60.07,34.802 60.07,34.474 LED61.2
NetLED63_2: LED63.2 LED64.4 | length 4.6
  Top Layer w0.5: LED64.4 52.07,34.802 52.07,34.602 LED63.2
NetLED65_2: LED65.2 LED66.4 | length 4.6
  Top Layer w0.5: LED66.4 38.67,32.202 38.67,32.002 LED65.2
NetLED66_2: LED66.2 LED68.4 | length 4.6
  Top Layer w0.5: LED68.4 30.67,32.076 30.67,32.002 LED66.2
NetLED68_2: LED68.2 LED69.4 | length 4.6
  Top Layer w0.5: LED69.4 22.544,32.202 22.544,32.002 LED68.2
NetLED69_2: LED69.2 LED70.4 | length 4.6
  Top Layer w0.5: LED70.4 14.544,32.202 14.544,32.002 LED69.2
NetLED70_2: LED70.2 LED71.4 | length 11.9
  Top Layer w0.5: LED70.2 6.794,30.558 6.858,30.494 v1(6.858,30.48) ; v1(13.462,24.638) 13.472,24.628 13.523,24.628 14.399,23.752 LED71.4
  Bottom Layer w0.5: v1(6.858,30.48) 12.69,24.648 13.452,24.648 v1(13.462,24.638)
NetLED71_2: LED71.2 LED72.4 | length 4.6
  Top Layer w0.5: LED71.2 22.449,24.202 22.449,24.002 LED72.4
NetLED74_2: LED74.2 LED75.4 | length 4.6
  Top Layer w0.5: LED74.2 38.575,24.202 38.575,24.002 LED75.4
NetLED75_2: LED75.2 LED76.4 | length 4.6
  Top Layer w0.5: LED75.2 46.575,24.202 46.575,24.002 LED76.4
NetLED76_2: LED76.2 LED77.4 | length 4.6
  Top Layer w0.5: LED76.2 51.975,26.802 51.975,26.602 LED77.4
NetLED77_2: LED77.2 LED79.4 | length 4.5
  Top Layer w0.5: LED77.2 59.975,26.802 59.975,26.474 LED79.4
NetLED79_2: LED79.2 LED80.4 | length 4.6
  Top Layer w0.5: LED79.2 67.847,26.802 67.847,26.602 LED80.4
NetLED81_2: LED81.2 LED83.4 | length 4.5
  Top Layer w0.5: LED83.4 60.07,18.802 60.07,18.474 LED81.2
NetLED83_2: LED83.2 LED84.4 | length 4.6
  Top Layer w0.5: LED84.4 52.07,18.802 52.07,18.602 LED83.2
NetLED84_2: LED84.2 LED85.4 | length 4.6
  Top Layer w0.5: LED85.4 46.67,16.202 46.67,16.002 LED84.2
NetLED85_2: LED85.2 LED86.4 | length 4.6
  Top Layer w0.5: LED86.4 38.67,16.202 38.67,16.002 LED85.2
NetLED86_2: LED86.2 LED88.4 | length 4.6
  Top Layer w0.5: LED88.4 30.67,16.076 30.67,16.002 LED86.2
NetLED89_2: LED89.2 LED90.4 | length 4.9
  Top Layer w0.5: LED89.2 35.898,11.052 38.198,8.752 38.198,7.952 38.398,7.752 LED90.4
NetLED90_2: LED90.2 LED91.4 | length 4.9
  Top Layer w0.5: LED90.2 43.898,11.052 46.198,8.752 46.198,7.952 46.398,7.752 LED91.4
NetLED91_2: LED91.2 LED92.4 | length 4.9
  Top Layer w0.5: LED91.2 51.898,11.052 54.198,8.752 54.198,7.952 54.398,7.752 LED92.4

## Polygon pours and split planes (outlines as drawn)
GND on Bottom Layer "GND_L02_P004" (solid, remove dead copper, pour order 4): 45.212,0.466 cw(c45.212,45.466) 0.212,45.466 cw(c45.212,45.466) 45.212,90.466 cw(c45.212,45.466) 90.212,45.466 cw(c45.212,45.466)
NetCON1_1 on Bottom Layer "NONET_L-01_P-001" (solid, remove dead copper, pour order 0): 47.244,68.58 53.34,68.58 53.34,70.612 47.244,70.612

## Silkscreen, mask and mechanical layers (free items; w line width, h text height)
Mechanical 15:
  circle w0.254: c45.212,45.466 r45